# Altium PCB mini_backplane.PcbDoc (part 1 of 5)
Units mm, origin at the board's own origin, x right, y up, seen from the top; angles counter-clockwise.
Board outline 232.03 x 195 mm, 5 copper layers (Top Layer, MidLayer1, GND, POWER, Bottom Layer); 241 components, 200 nets, 1637 pads, 676 vias.
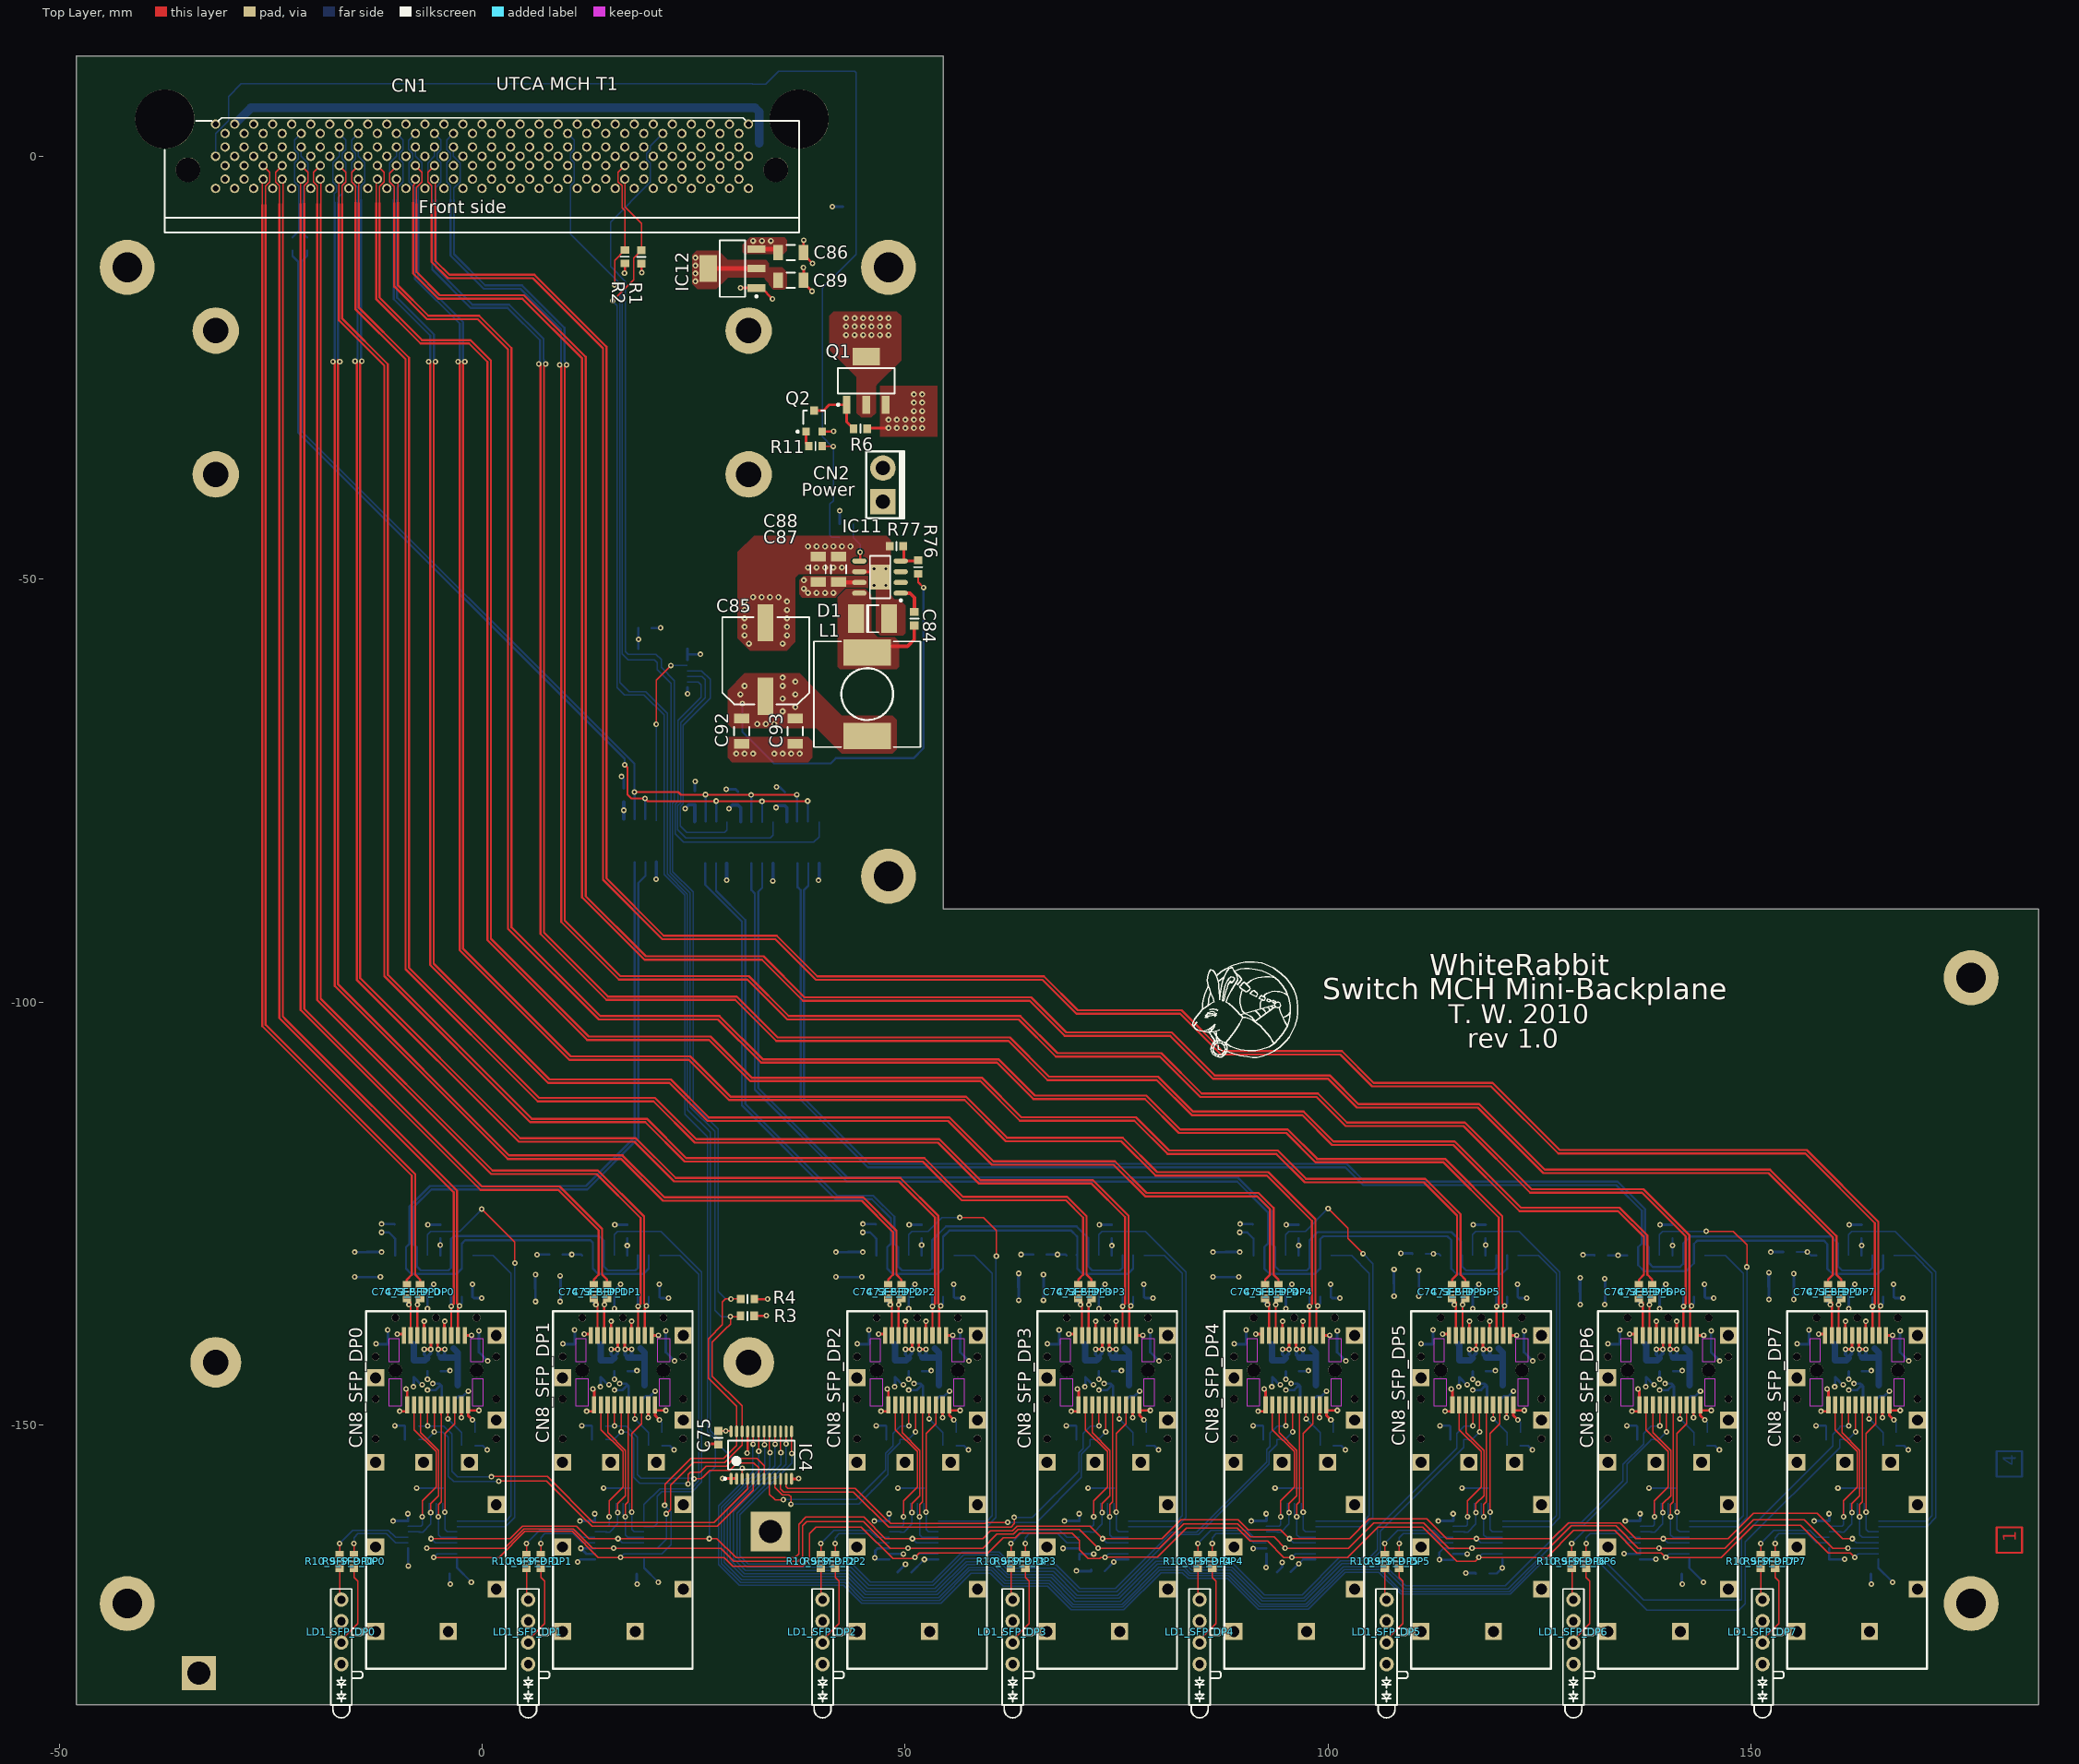
[diagram p0: Top Layer view]
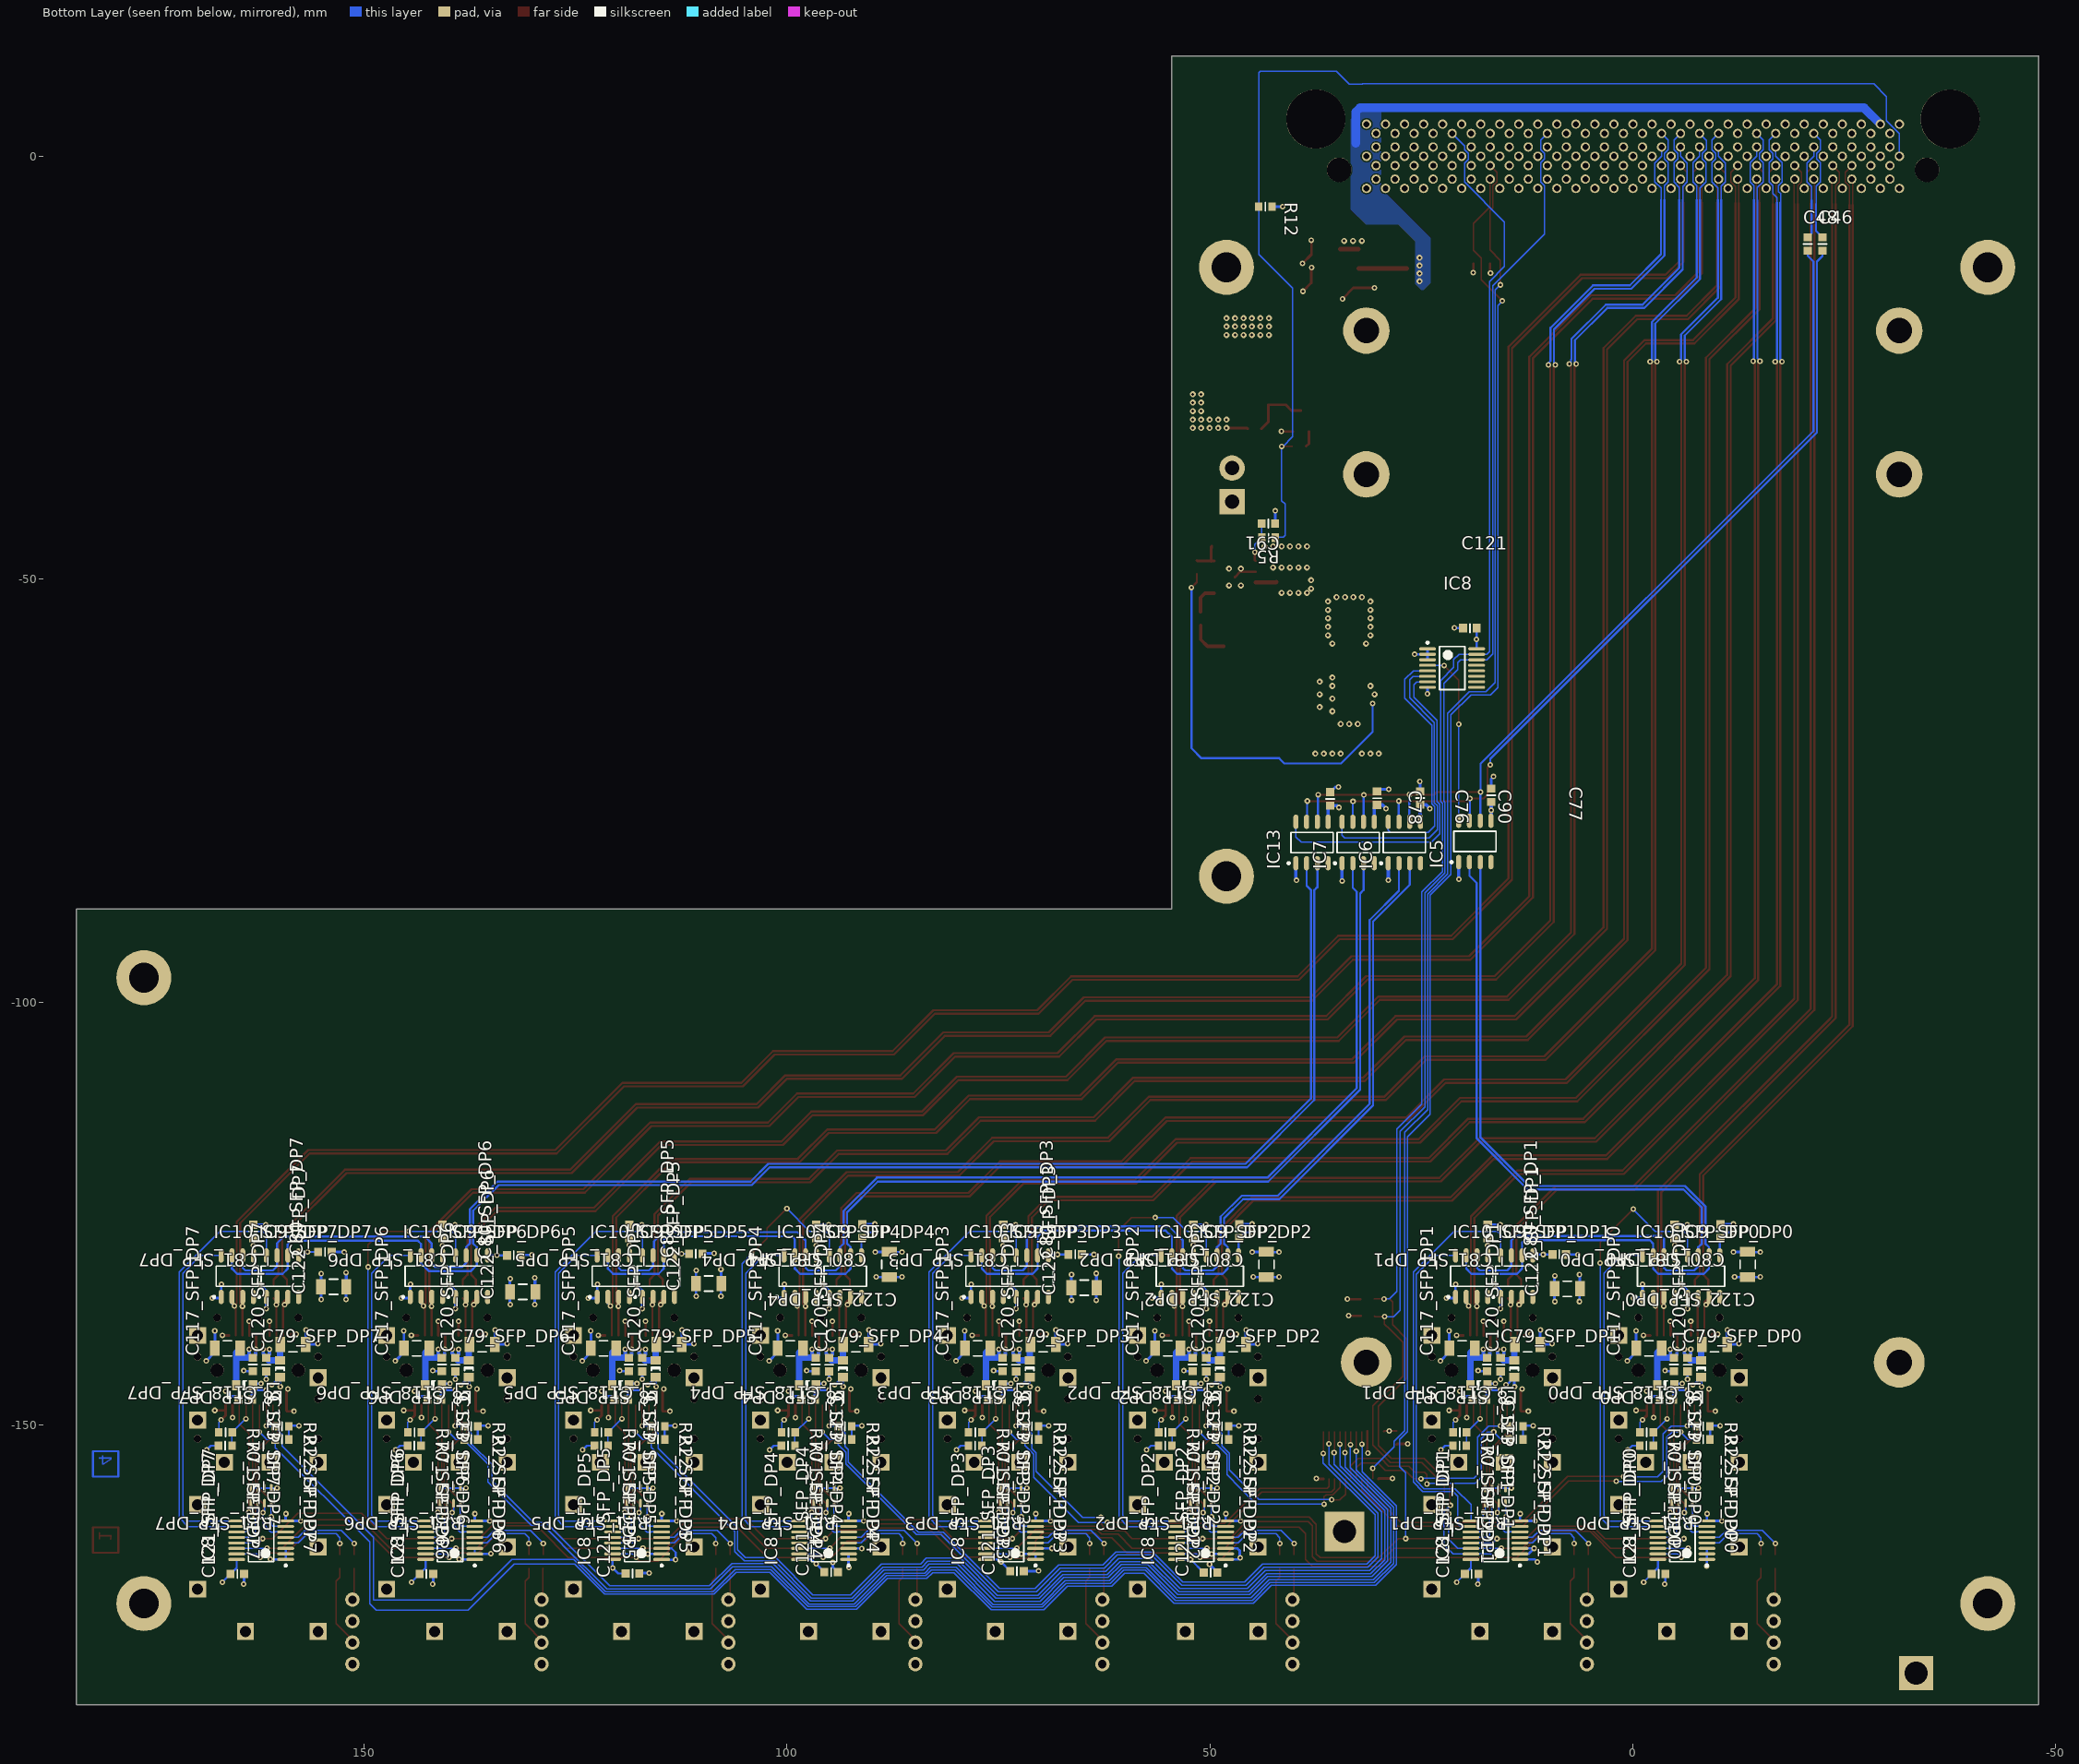
[diagram p1: Bottom Layer view, seen from below]
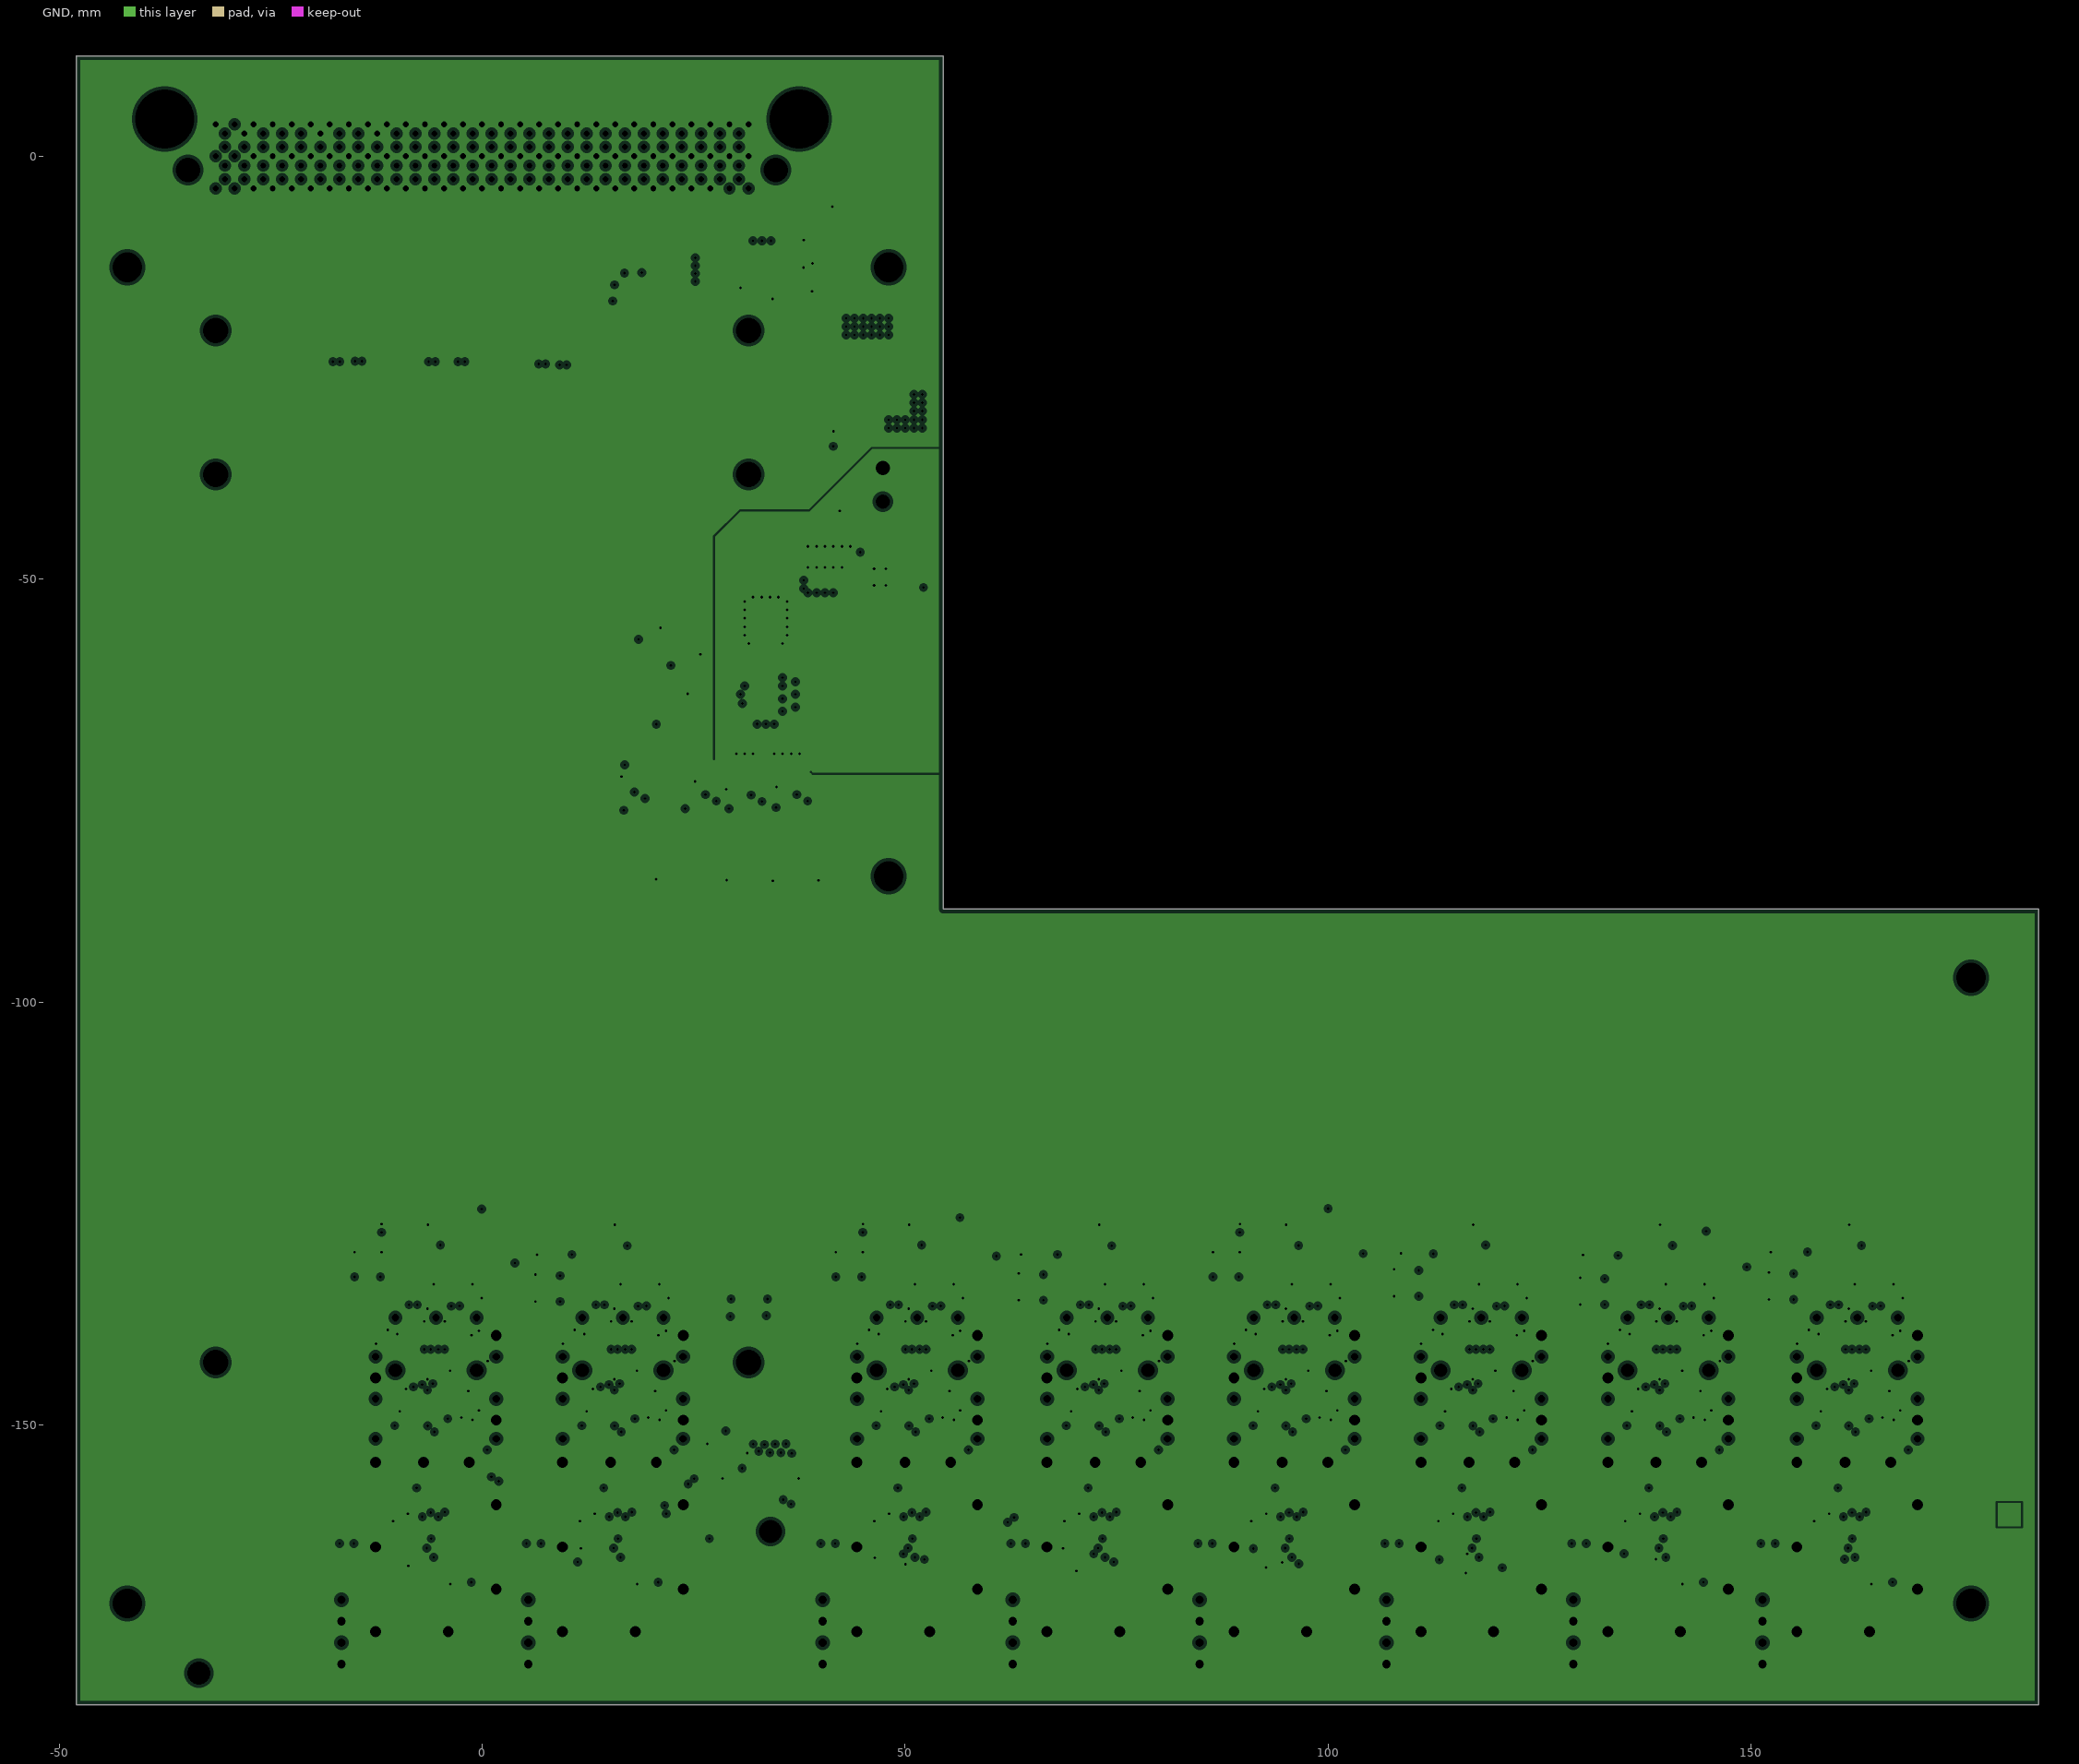
[diagram p2: GND, clearances drawn from the general rule]
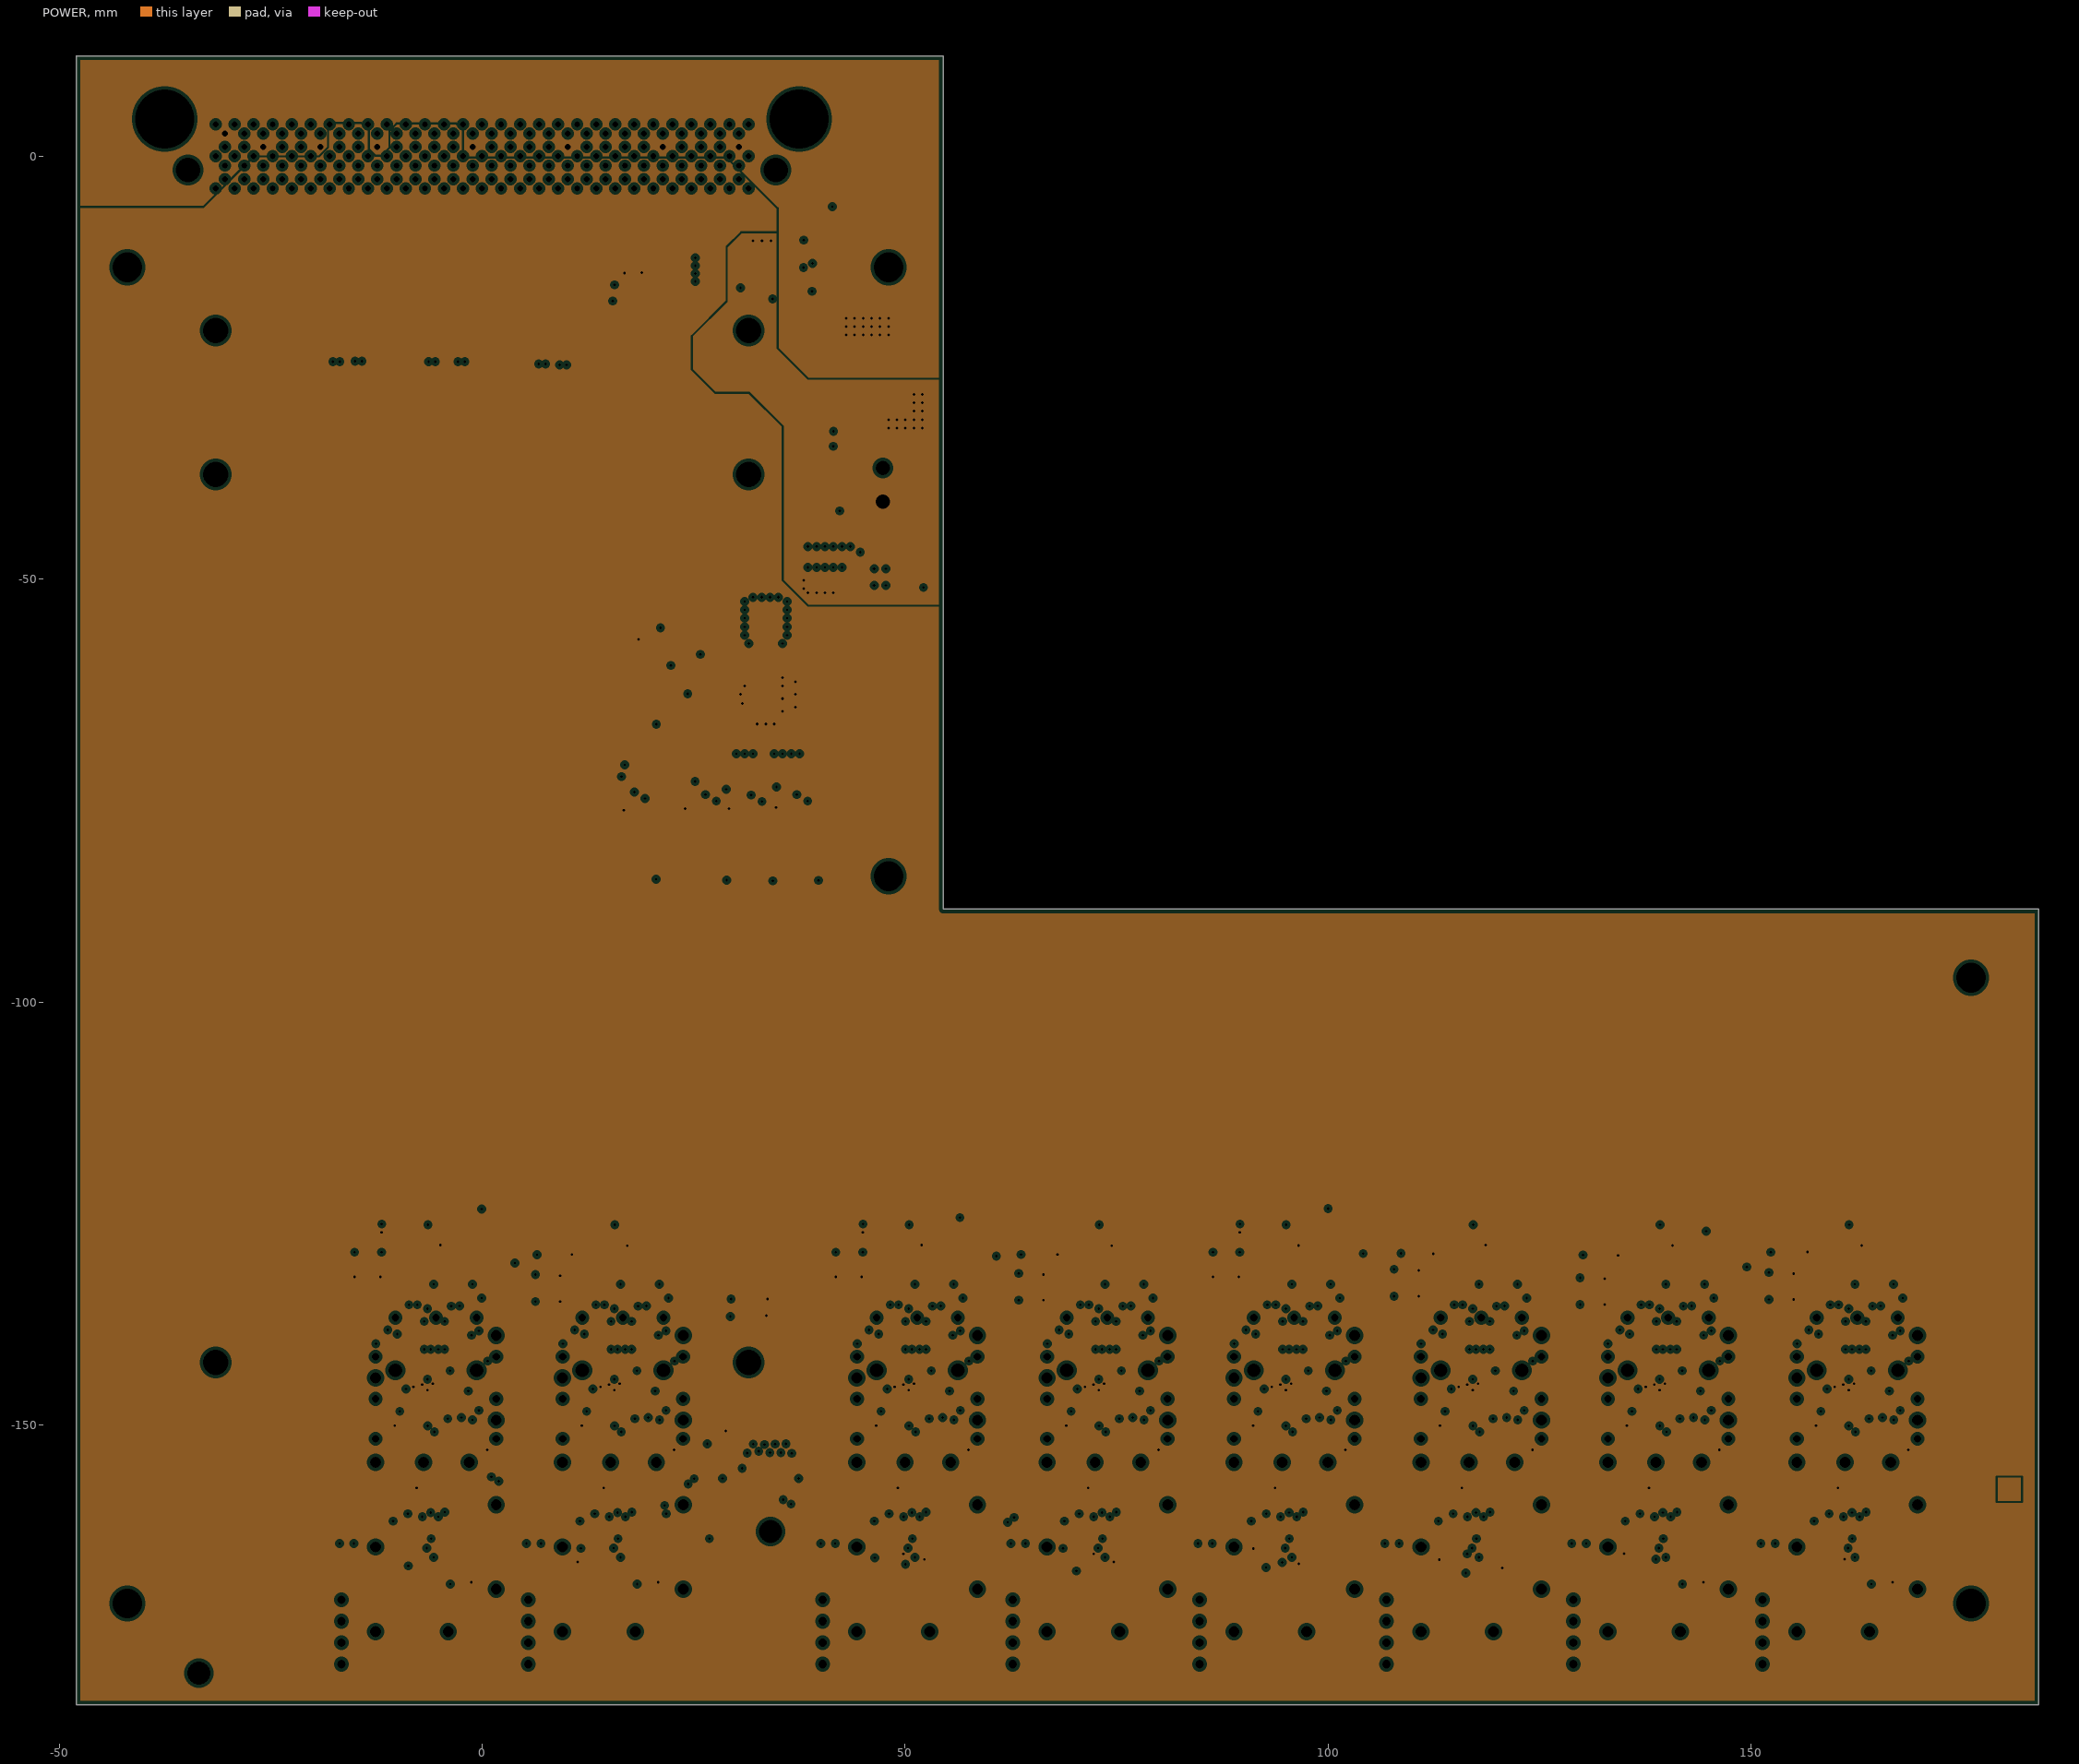
[diagram p3: POWER, clearances drawn from the general rule]
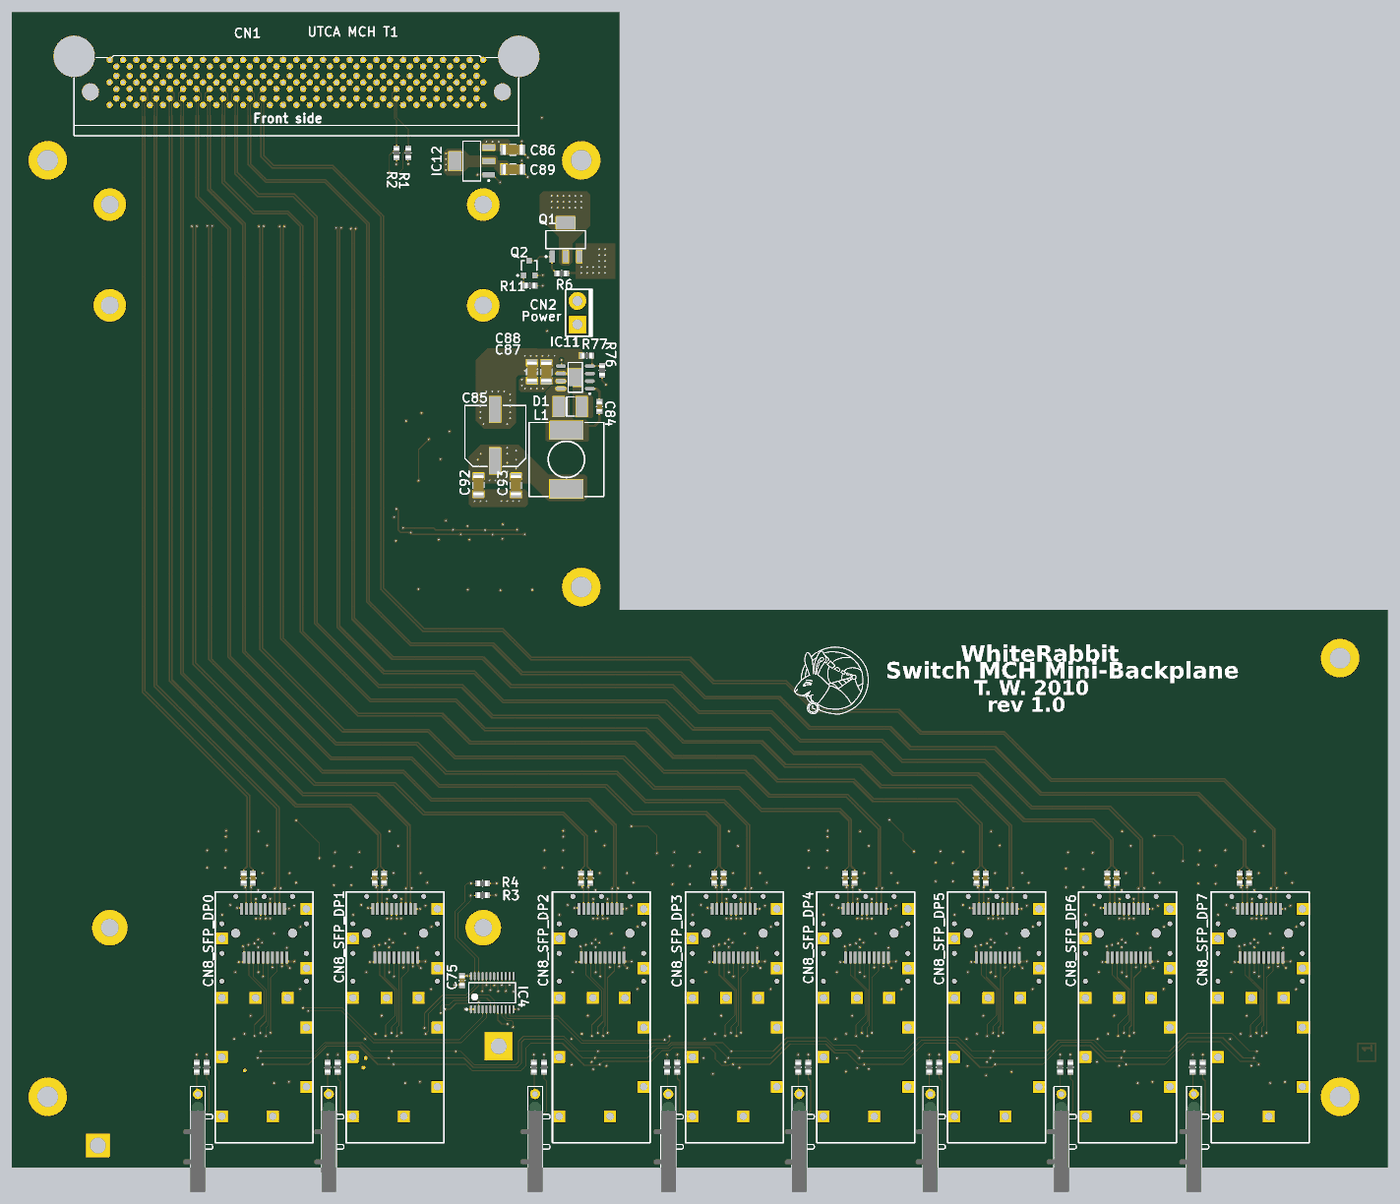
[diagram p8: 3D render of the assembled board from above, using the file's embedded part models]
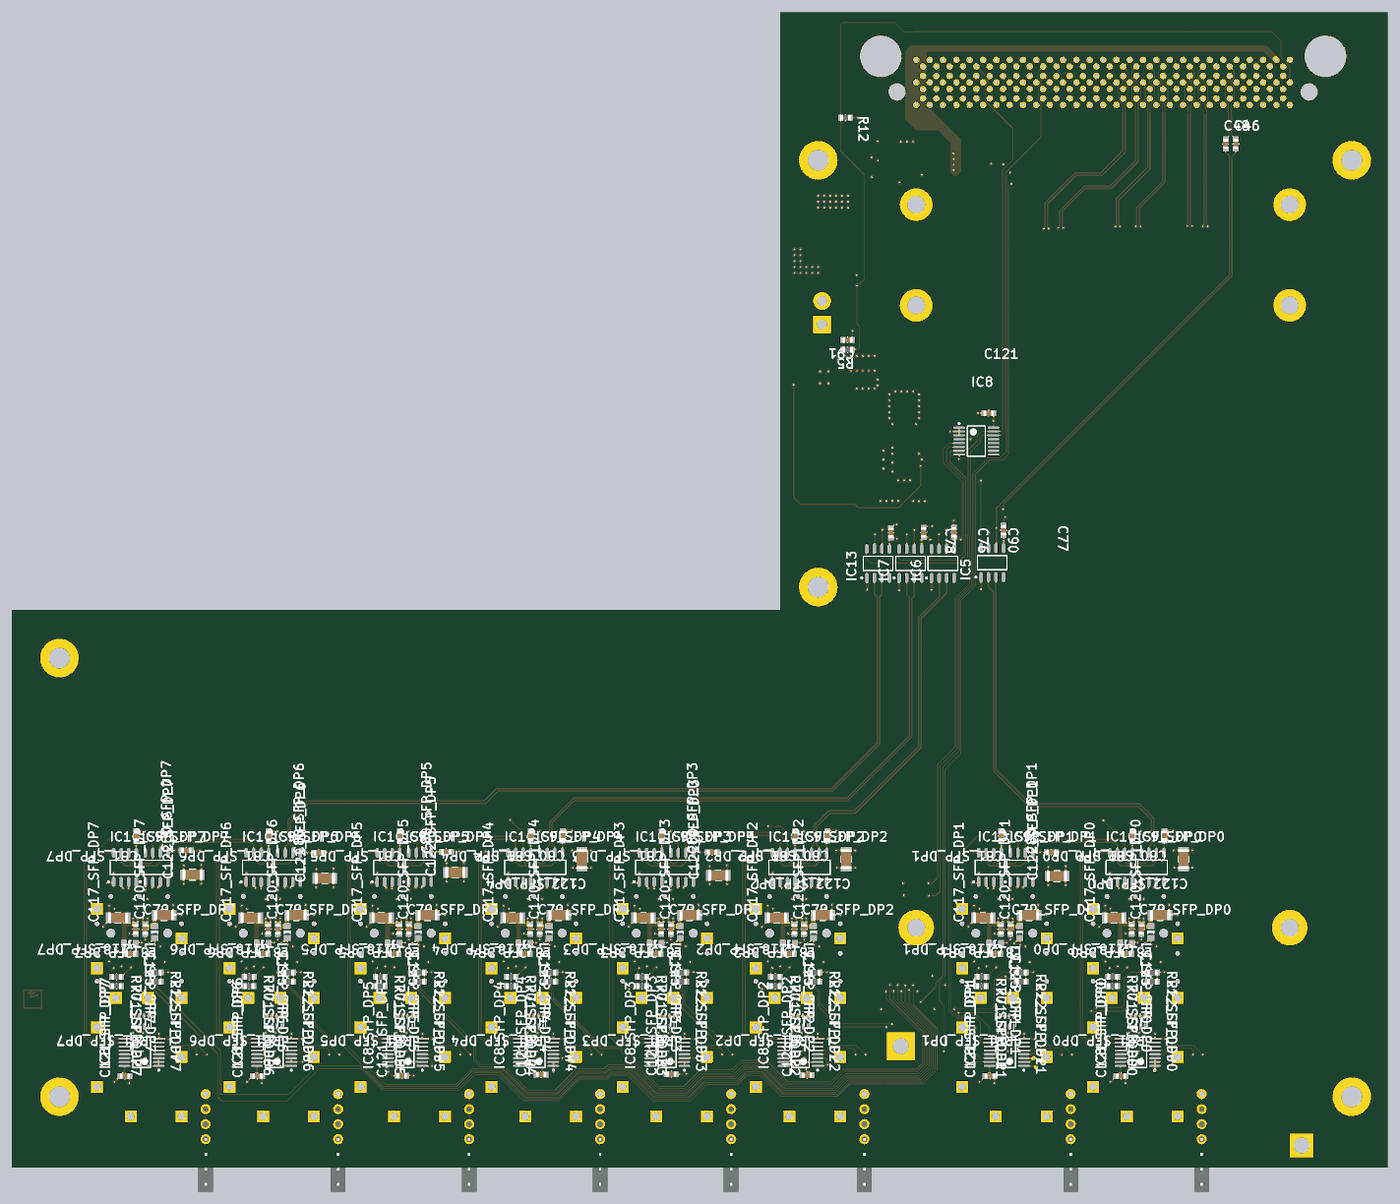
[diagram p9: 3D render of the assembled board from below, using the file's embedded part models]

## Layer stack, top to bottom
Top Layer: signal copper 0.0356
Dielectric: core 0.32, FR-4, Dk 4.8
MidLayer1: signal copper 0.0356
Dielectric: dielectric 0.32, FR-4, Dk 4.8
GND: plane copper 0.0356, net GND
Dielectric: prepreg 0.32, FR-4, Dk 4.8
POWER: plane copper 0.0356, net (Multiple Nets)
Dielectric: core 0.32, FR-4, Dk 4.8
Bottom Layer: signal copper 0.0356

## Board outline
-47.981,-183.124 -47.981,11.847 -47.956,11.872 54.508,11.872 54.508,-88.991 184.048,-88.991 184.048,-183.124

## Design rules (kind name [scope] priority, off if disabled: settings)
Clearance [All] p1: gap=0.152
DiffPairsRouting [All] p1: maxlimit=0.254 minlimit=0.152 mostfreqgap=0.254 toplayer_maxgap=0.152 toplayer_prefgap=0.152 midlayer1_mingap=0.254 bottomlayer_maxgap=0.152 bottomlayer_prefgap=0.152 maxuncoupledlength=12.7
HoleSize [All] p1: absolutevalues=TRUE maxlimit=5.08 minlimit=0.254 maxpercent=80.000 minpercent=20.000
MinimumSolderMaskSliver [All] p1: minsoldermaskwidth=0.051
PlaneClearance [All] p1: clearance=0.381
PlaneConnect [All] p1: planeconnectstyle=Direct reliefexpansion=0.508 reliefentries=4 reliefconductorwidth=0.254 reliefairgap=0.254
PolygonConnect PolygonConnect_via [All vs isvia] p1: connectstyle=Direct reliefconductorwidth=0.254 reliefentries=4 polygonreliefangle="90 Angle"
PolygonConnect [All] p2: connectstyle=Direct reliefconductorwidth=0.254 reliefentries=4 polygonreliefangle="90 Angle"
RoomDefinition U_power_supply [InComponentClass('U_power_supply')] p1: confinementstyle=ConfineIn formatcopy=TRUE lockcomponents=FALSE outline 24.561,-8.499 53.771,-8.499 53.771,-72.812 24.561,-72.812
RoomDefinition SFP_DP7 [InComponentClass('SFP_DP7')] p2: confinementstyle=ConfineIn formatcopy=TRUE lockcomponents=FALSE outline 150.012,-183.098 172.11,-183.098 172.11,-124.501 150.012,-124.501
RoomDefinition SFP_DP0 [InComponentClass('SFP_DP0')] p3: confinementstyle=ConfineIn formatcopy=TRUE lockcomponents=TRUE outline -18.009,-183.098 4.089,-183.098 4.089,-124.501 -18.009,-124.501
RoomDefinition SFP_DP1 [InComponentClass('SFP_DP1')] p4: confinementstyle=ConfineIn formatcopy=TRUE lockcomponents=FALSE outline 4.089,-183.098 26.187,-183.098 26.187,-124.501 4.089,-124.501
RoomDefinition U_i2c_stuff [InComponentClass('U_i2c_stuff')] p5: confinementstyle=ConfineIn formatcopy=TRUE lockcomponents=FALSE outline 26.593,-166.004 37.998,-166.004 37.998,-132.375 26.593,-132.375
RoomDefinition SFP_DP6 [InComponentClass('SFP_DP6')] p6: confinementstyle=ConfineIn formatcopy=TRUE lockcomponents=FALSE outline 127.66,-183.098 149.758,-183.098 149.758,-124.501 127.66,-124.501
RoomDefinition SFP_DP5 [InComponentClass('SFP_DP5')] p7: confinementstyle=ConfineIn formatcopy=TRUE lockcomponents=FALSE outline 105.562,-183.098 127.66,-183.098 127.66,-124.501 105.562,-124.501
RoomDefinition SFP_DP4 [InComponentClass('SFP_DP4')] p8: confinementstyle=ConfineIn formatcopy=TRUE lockcomponents=FALSE outline 83.464,-183.098 105.562,-183.098 105.562,-124.501 83.464,-124.501
RoomDefinition SFP_DP3 [InComponentClass('SFP_DP3')] p9: confinementstyle=ConfineIn formatcopy=TRUE lockcomponents=FALSE outline 61.366,-183.098 83.464,-183.098 83.464,-124.501 61.366,-124.501
RoomDefinition SFP_DP2 [InComponentClass('SFP_DP2')] p10: confinementstyle=ConfineIn formatcopy=TRUE lockcomponents=FALSE outline 38.887,-183.098 60.985,-183.098 60.985,-124.501 38.887,-124.501
RoutingVias [All] p1: holewidth=0.305 width=0.66 viastyle="Through Hole" minholewidth=0.305 minwidth=0.61 maxholewidth=2.54 maxwidth=2.54
SilkscreenOverComponentPads [All] p1: minsilkscreentomaskgap=0.254
SolderMaskExpansion [All] p1: expansion=0.102
TestPointUsage [All] p1: valid=0 allowmultiple=FALSE
Testpoint [All] p1: side=15 testpointundercomponent=TRUE minsize=1.016 maxsize=2.54 preferedsize=1.524 minholesize=0 maxholesize=1.016 preferedholesize=0.813 testpointgrid=0.025 style=1023 order=0123456789
Width Width_DIFF [(InDifferentialPairClass('All Differential Pairs'))] p1: maxlimit=0.254 minlimit=0.152 preferedwidth=0.254
Width [All] p2: maxlimit=2.54 minlimit=0.152 preferedwidth=0.152
18 further rules are at their usual default settings.

## Classes and differential pairs
component class mini_backplane: C46 C48 C76 C77 C78 C90 C? CN1 IC5 IC6 IC7 IC13 R1
component class SFP_DP0: C73_SFP_DP0 C74_SFP_DP0 C79_SFP_DP0 C80_SFP_DP0 C81_SFP_DP0 C117_SFP_DP0 C118_SFP_DP0 C120_SFP_DP0 C121_SFP_DP0 C122_SFP_DP0 C123_SFP_DP0 CN8_SFP_DP0 IC8_SFP_DP0 IC9_SFP_DP0 IC10_SFP_DP0 L8_SFP_DP0 L9_SFP_DP0 LD1_SFP_DP0 R9_SFP_DP0 R10_SFP_DP0 R21_SFP_DP0 R22_SFP_DP0 R70_SFP_DP0 R71_SFP_DP0 RP1_SFP_DP0
component class SFP_DP1: C73_SFP_DP1 C74_SFP_DP1 C79_SFP_DP1 C80_SFP_DP1 C81_SFP_DP1 C117_SFP_DP1 C118_SFP_DP1 C120_SFP_DP1 C121_SFP_DP1 C122_SFP_DP1 C123_SFP_DP1 CN8_SFP_DP1 IC8_SFP_DP1 IC9_SFP_DP1 IC10_SFP_DP1 L8_SFP_DP1 L9_SFP_DP1 LD1_SFP_DP1 R9_SFP_DP1 R10_SFP_DP1 R21_SFP_DP1 R22_SFP_DP1 R70_SFP_DP1 R71_SFP_DP1 RP1_SFP_DP1
component class SFP_DP2: C73_SFP_DP2 C74_SFP_DP2 C79_SFP_DP2 C80_SFP_DP2 C81_SFP_DP2 C117_SFP_DP2 C118_SFP_DP2 C120_SFP_DP2 C121_SFP_DP2 C122_SFP_DP2 C123_SFP_DP2 CN8_SFP_DP2 IC8_SFP_DP2 IC9_SFP_DP2 IC10_SFP_DP2 L8_SFP_DP2 L9_SFP_DP2 LD1_SFP_DP2 R9_SFP_DP2 R10_SFP_DP2 R21_SFP_DP2 R22_SFP_DP2 R70_SFP_DP2 R71_SFP_DP2 RP1_SFP_DP2
component class SFP_DP3: C73_SFP_DP3 C74_SFP_DP3 C79_SFP_DP3 C80_SFP_DP3 C81_SFP_DP3 C117_SFP_DP3 C118_SFP_DP3 C120_SFP_DP3 C121_SFP_DP3 C122_SFP_DP3 C123_SFP_DP3 CN8_SFP_DP3 IC8_SFP_DP3 IC9_SFP_DP3 IC10_SFP_DP3 L8_SFP_DP3 L9_SFP_DP3 LD1_SFP_DP3 R9_SFP_DP3 R10_SFP_DP3 R21_SFP_DP3 R22_SFP_DP3 R70_SFP_DP3 R71_SFP_DP3 RP1_SFP_DP3
component class SFP_DP4: C73_SFP_DP4 C74_SFP_DP4 C79_SFP_DP4 C80_SFP_DP4 C81_SFP_DP4 C117_SFP_DP4 C118_SFP_DP4 C120_SFP_DP4 C121_SFP_DP4 C122_SFP_DP4 C123_SFP_DP4 CN8_SFP_DP4 IC8_SFP_DP4 IC9_SFP_DP4 IC10_SFP_DP4 L8_SFP_DP4 L9_SFP_DP4 LD1_SFP_DP4 R9_SFP_DP4 R10_SFP_DP4 R21_SFP_DP4 R22_SFP_DP4 R70_SFP_DP4 R71_SFP_DP4 RP1_SFP_DP4
component class SFP_DP5: C73_SFP_DP5 C74_SFP_DP5 C79_SFP_DP5 C80_SFP_DP5 C81_SFP_DP5 C117_SFP_DP5 C118_SFP_DP5 C120_SFP_DP5 C121_SFP_DP5 C122_SFP_DP5 C123_SFP_DP5 CN8_SFP_DP5 IC8_SFP_DP5 IC9_SFP_DP5 IC10_SFP_DP5 L8_SFP_DP5 L9_SFP_DP5 LD1_SFP_DP5 R9_SFP_DP5 R10_SFP_DP5 R21_SFP_DP5 R22_SFP_DP5 R70_SFP_DP5 R71_SFP_DP5 RP1_SFP_DP5
component class SFP_DP6: C73_SFP_DP6 C74_SFP_DP6 C79_SFP_DP6 C80_SFP_DP6 C81_SFP_DP6 C117_SFP_DP6 C118_SFP_DP6 C120_SFP_DP6 C121_SFP_DP6 C122_SFP_DP6 C123_SFP_DP6 CN8_SFP_DP6 IC8_SFP_DP6 IC9_SFP_DP6 IC10_SFP_DP6 L8_SFP_DP6 L9_SFP_DP6 LD1_SFP_DP6 R9_SFP_DP6 R10_SFP_DP6 R21_SFP_DP6 R22_SFP_DP6 R70_SFP_DP6 R71_SFP_DP6 RP1_SFP_DP6
component class SFP_DP7: C73_SFP_DP7 C74_SFP_DP7 C79_SFP_DP7 C80_SFP_DP7 C81_SFP_DP7 C117_SFP_DP7 C118_SFP_DP7 C120_SFP_DP7 C121_SFP_DP7 C122_SFP_DP7 C123_SFP_DP7 CN8_SFP_DP7 IC8_SFP_DP7 IC9_SFP_DP7 IC10_SFP_DP7 L8_SFP_DP7 L9_SFP_DP7 LD1_SFP_DP7 R9_SFP_DP7 R10_SFP_DP7 R21_SFP_DP7 R22_SFP_DP7 R70_SFP_DP7 R71_SFP_DP7 RP1_SFP_DP7
channel class sfp_wrapper: SFP_DP0 SFP_DP1 SFP_DP2 SFP_DP3 SFP_DP4 SFP_DP5 SFP_DP6 SFP_DP7
component class U_i2c_stuff: C75 C121 IC4 IC8 R2 R3 R4
component class U_power_supply: C84 C85 C86 C87 C88 C89 C91 C92 C93 CN2 D1 IC11 IC12 L1 Q1 Q2 R5 R6 R11 R12 R76 R77
differential pair RD_OUT_SFP_DP7: +RD_OUT_SFP_DP7_P -RD_OUT_SFP_DP7_N
differential pair SFP_TX7: +SFP_TX7_P -SFP_TX7_N
differential pair RD_OUT_SFP_DP0: +RD_OUT_SFP_DP0_P -RD_OUT_SFP_DP0_N
differential pair RD_OUT_SFP_DP1: +RD_OUT_SFP_DP1_P -RD_OUT_SFP_DP1_N
differential pair RD_OUT_SFP_DP2: +RD_OUT_SFP_DP2_P -RD_OUT_SFP_DP2_N
differential pair RD_OUT_SFP_DP3: +RD_OUT_SFP_DP3_P -RD_OUT_SFP_DP3_N
differential pair RD_OUT_SFP_DP4: +RD_OUT_SFP_DP4_P -RD_OUT_SFP_DP4_N
differential pair RD_OUT_SFP_DP5: +RD_OUT_SFP_DP5_P -RD_OUT_SFP_DP5_N
differential pair RD_OUT_SFP_DP6: +RD_OUT_SFP_DP6_P -RD_OUT_SFP_DP6_N
differential pair SFP_TX0: +SFP_TX0_P -SFP_TX0_N
differential pair SFP_TX1: +SFP_TX1_P -SFP_TX1_N
differential pair SFP_TX2: +SFP_TX2_P -SFP_TX2_N
differential pair SFP_TX3: +SFP_TX3_P -SFP_TX3_N
differential pair SFP_TX4: +SFP_TX4_P -SFP_TX4_N
differential pair SFP_TX5: +SFP_TX5_P -SFP_TX5_N
differential pair SFP_TX6: +SFP_TX6_P -SFP_TX6_N
differential pair FB_01: +FB_01_P -FB_01_N
differential pair FB_23: +FB_23_P -FB_23_N
differential pair FB_45: +FB_45_P -FB_45_N
differential pair FB_67: +FB_67_P -FB_67_N
differential pair FB_MUXED: +FB_MUXED_P -FB_MUXED_N

## Components (designator, comment, footprint, x,y, rotation, side; value= is the part's Value field where it differs from the comment)
C46 "10n" CAPC1608X87N -22.403,-10.378 r90 bottom
C48 "10n" CAPC1608X87N -20.676,-10.378 r90 bottom
C73_SFP_DP0 "10n" CAPC1608X87N -7.316,-134.254 r270 top (schematic designator C73)
C73_SFP_DP1 "10n" CAPC1608X87N 14.782,-134.254 r270 top (schematic designator C73)
C73_SFP_DP2 "10n" CAPC1608X87N 49.58,-134.254 r270 top (schematic designator C73)
C73_SFP_DP3 "10n" CAPC1608X87N 72.059,-134.254 r270 top (schematic designator C73)
C73_SFP_DP4 "10n" CAPC1608X87N 94.157,-134.254 r270 top (schematic designator C73)
C73_SFP_DP5 "10n" CAPC1608X87N 116.255,-134.254 r270 top (schematic designator C73)
C73_SFP_DP6 "10n" CAPC1608X87N 138.353,-134.254 r270 top (schematic designator C73)
C73_SFP_DP7 "10n" CAPC1608X87N 160.705,-134.254 r270 top (schematic designator C73)
C74_SFP_DP0 "10n" CAPC1608X87N -8.89,-134.254 r270 top (schematic designator C74)
C74_SFP_DP1 "10n" CAPC1608X87N 13.208,-134.254 r270 top (schematic designator C74)
C74_SFP_DP2 "10n" CAPC1608X87N 48.006,-134.254 r270 top (schematic designator C74)
C74_SFP_DP3 "10n" CAPC1608X87N 70.485,-134.254 r270 top (schematic designator C74)
C74_SFP_DP4 "10n" CAPC1608X87N 92.583,-134.254 r270 top (schematic designator C74)
C74_SFP_DP5 "10n" CAPC1608X87N 114.681,-134.254 r270 top (schematic designator C74)
C74_SFP_DP6 "10n" CAPC1608X87N 136.779,-134.254 r270 top (schematic designator C74)
C74_SFP_DP7 "10n" CAPC1608X87N 159.131,-134.254 r270 top (schematic designator C74)
C75 "100n" CAPC1608X87N 27.94,-151.526 r90 top
C76 "100n" CAPC1608X87N 30.251,-75.91 r270 bottom
C77 "100n" CAPC1608X87N 16.764,-75.555 r270 bottom
C78 "100n" CAPC1608X87N 35.788,-75.987 r270 bottom
C79_SFP_DP0 "100n" CAPC1608X87N -6.452,-142.89 r90 bottom (schematic designator C79)
C79_SFP_DP1 "100n" CAPC1608X87N 15.646,-142.89 r90 bottom (schematic designator C79)
C79_SFP_DP2 "100n" CAPC1608X87N 50.444,-142.89 r90 bottom (schematic designator C79)
C79_SFP_DP3 "100n" CAPC1608X87N 72.923,-142.89 r90 bottom (schematic designator C79)
C79_SFP_DP4 "100n" CAPC1608X87N 95.021,-142.89 r90 bottom (schematic designator C79)
C79_SFP_DP5 "100n" CAPC1608X87N 117.119,-142.89 r90 bottom (schematic designator C79)
C79_SFP_DP6 "100n" CAPC1608X87N 139.217,-142.89 r90 bottom (schematic designator C79)
C79_SFP_DP7 "100n" CAPC1608X87N 161.569,-142.89 r90 bottom (schematic designator C79)
C80_SFP_DP0 "100n" CAPC1608X87N -10.364,-127.091 r270 bottom (schematic designator C80)
C80_SFP_DP1 "100n" CAPC1608X87N 8.712,-129.86 r0 bottom (schematic designator C80)
C80_SFP_DP2 "100n" CAPC1608X87N 46.532,-127.091 r270 bottom (schematic designator C80)
C80_SFP_DP3 "100n" CAPC1608X87N 65.938,-129.86 r0 bottom (schematic designator C80)
C80_SFP_DP4 "100n" CAPC1608X87N 91.109,-127.091 r270 bottom (schematic designator C80)
C80_SFP_DP5 "100n" CAPC1608X87N 110.794,-129.784 r0 bottom (schematic designator C80)
C80_SFP_DP6 "100n" CAPC1608X87N 132.308,-129.962 r0 bottom (schematic designator C80)
C80_SFP_DP7 "100n" CAPC1608X87N 154.635,-129.555 r0 bottom (schematic designator C80)
C81_SFP_DP0 "100n" CAPC1608X87N -4.928,-127.142 r270 bottom (schematic designator C81)
C81_SFP_DP1 "100n" CAPC1608X87N 17.17,-127.142 r270 bottom (schematic designator C81)
C81_SFP_DP2 "100n" CAPC1608X87N 51.968,-127.142 r270 bottom (schematic designator C81)
C81_SFP_DP3 "100n" CAPC1608X87N 74.447,-127.142 r270 bottom (schematic designator C81)
C81_SFP_DP4 "100n" CAPC1608X87N 96.545,-127.142 r270 bottom (schematic designator C81)
C81_SFP_DP5 "100n" CAPC1608X87N 118.643,-127.142 r270 bottom (schematic designator C81)
C81_SFP_DP6 "100n" CAPC1608X87N 140.741,-127.142 r270 bottom (schematic designator C81)
C81_SFP_DP7 "100n" CAPC1608X87N 163.093,-127.142 r270 bottom (schematic designator C81)
C84 "10n" CAPC1608X87N 51.104,-54.676 r270 top
C85 "470u/6.3V OS-CON" OSCON_F12 33.502,-59.502 r90 top
C86 "10u X7R" CAPC3216X140N 36.499,-11.369 r180 top
C87 "10u X7R" CAPC3216X140N 39.725,-48.809 r270 top
C88 "10u X7R" CAPC3216X140N 42.164,-48.834 r270 top
C89 "10u X7R" CAPC3216X140N 36.525,-14.671 r180 top
C90 "100n" CAPC1608X87N 25.171,-75.885 r270 bottom
C91 "1u" CAPC1608X87N 43.103,-43.449 r0 bottom
C92 "1u" CAPC3216X140N 30.708,-67.96 r90 top
C93 "1u" CAPC3216X140N 37.033,-67.96 r90 top
C117_SFP_DP0 "10u/6.3V X7R" CAPC3216X140N -1.88,-140.96 r0 bottom (schematic designator C117)
C117_SFP_DP1 "10u/6.3V X7R" CAPC3216X140N 20.218,-140.96 r0 bottom (schematic designator C117)
C117_SFP_DP2 "10u/6.3V X7R" CAPC3216X140N 55.016,-140.96 r0 bottom (schematic designator C117)
C117_SFP_DP3 "10u/6.3V X7R" CAPC3216X140N 77.495,-140.96 r0 bottom (schematic designator C117)
C117_SFP_DP4 "10u/6.3V X7R" CAPC3216X140N 99.593,-140.96 r0 bottom (schematic designator C117)
C117_SFP_DP5 "10u/6.3V X7R" CAPC3216X140N 121.691,-140.96 r0 bottom (schematic designator C117)
C117_SFP_DP6 "10u/6.3V X7R" CAPC3216X140N 143.789,-140.96 r0 bottom (schematic designator C117)
C117_SFP_DP7 "10u/6.3V X7R" CAPC3216X140N 166.141,-140.96 r0 bottom (schematic designator C117)
C118_SFP_DP0 "100n" CAPC1608X87N -4.852,-142.865 r270 bottom (schematic designator C118)
C118_SFP_DP1 "100n" CAPC1608X87N 17.246,-142.865 r270 bottom (schematic designator C118)
C118_SFP_DP2 "100n" CAPC1608X87N 52.044,-142.865 r270 bottom (schematic designator C118)
C118_SFP_DP3 "100n" CAPC1608X87N 74.523,-142.865 r270 bottom (schematic designator C118)
C118_SFP_DP4 "100n" CAPC1608X87N 96.621,-142.865 r270 bottom (schematic designator C118)
C118_SFP_DP5 "100n" CAPC1608X87N 118.719,-142.865 r270 bottom (schematic designator C118)
C118_SFP_DP6 "100n" CAPC1608X87N 140.817,-142.865 r270 bottom (schematic designator C118)
C118_SFP_DP7 "100n" CAPC1608X87N 163.169,-142.865 r270 bottom (schematic designator C118)
C120_SFP_DP0 "10u/6.3V X7R" CAPC3216X140N -9.627,-140.477 r0 bottom (schematic designator C120)
C120_SFP_DP1 "10u/6.3V X7R" CAPC3216X140N 12.471,-140.477 r0 bottom (schematic designator C120)
C120_SFP_DP2 "10u/6.3V X7R" CAPC3216X140N 47.269,-140.477 r0 bottom (schematic designator C120)
C120_SFP_DP3 "10u/6.3V X7R" CAPC3216X140N 69.748,-140.477 r0 bottom (schematic designator C120)
C120_SFP_DP4 "10u/6.3V X7R" CAPC3216X140N 91.846,-140.477 r0 bottom (schematic designator C120)
C120_SFP_DP5 "10u/6.3V X7R" CAPC3216X140N 113.944,-140.477 r0 bottom (schematic designator C120)
C120_SFP_DP6 "10u/6.3V X7R" CAPC3216X140N 136.042,-140.477 r0 bottom (schematic designator C120)
C120_SFP_DP7 "10u/6.3V X7R" CAPC3216X140N 158.394,-140.477 r0 bottom (schematic designator C120)
C121 "100n" CAPC1608X87N 19.278,-55.794 r180 bottom
C121_SFP_DP0 "100n" CAPC1608X87N -3.023,-167.63 r0 bottom (schematic designator C121)
C121_SFP_DP1 "100n" CAPC1608X87N 19.075,-167.63 r0 bottom (schematic designator C121)
C121_SFP_DP2 "100n" CAPC1608X87N 49.936,-167.477 r0 bottom (schematic designator C121)
C121_SFP_DP3 "100n" CAPC1608X87N 72.821,-167.3 r0 bottom (schematic designator C121)
C121_SFP_DP4 "100n" CAPC1608X87N 94.792,-167.401 r0 bottom (schematic designator C121)
C121_SFP_DP5 "100n" CAPC1608X87N 118.287,-167.579 r0 bottom (schematic designator C121)
C121_SFP_DP6 "100n" CAPC1608X87N 142.646,-167.63 r0 bottom (schematic designator C121)
C121_SFP_DP7 "100n" CAPC1608X87N 164.998,-167.63 r0 bottom (schematic designator C121)
C122_SFP_DP0 "10u/6.3V X7R" CAPC3216X140N -13.564,-131.028 r270 bottom (schematic designator C122)
C122_SFP_DP1 "10u/6.3V X7R" CAPC3216X140N 7.772,-133.924 r0 bottom (schematic designator C122)
C122_SFP_DP2 "10u/6.3V X7R" CAPC3216X140N 43.332,-131.028 r270 bottom (schematic designator C122)
C122_SFP_DP3 "10u/6.3V X7R" CAPC3216X140N 64.897,-133.772 r0 bottom (schematic designator C122)
C122_SFP_DP4 "10u/6.3V X7R" CAPC3216X140N 87.909,-131.028 r270 bottom (schematic designator C122)
C122_SFP_DP5 "10u/6.3V X7R" CAPC3216X140N 109.27,-133.289 r0 bottom (schematic designator C122)
C122_SFP_DP6 "10u/6.3V X7R" CAPC3216X140N 131.267,-134.28 r0 bottom (schematic designator C122)
C122_SFP_DP7 "10u/6.3V X7R" CAPC3216X140N 153.593,-133.67 r0 bottom (schematic designator C122)
C123_SFP_DP0 "100n" CAPC1608X87N -3.963,-147.03 r180 bottom (schematic designator C123)
C123_SFP_DP1 "100n" CAPC1608X87N 18.135,-147.03 r180 bottom (schematic designator C123)
C123_SFP_DP2 "100n" CAPC1608X87N 52.933,-147.03 r180 bottom (schematic designator C123)
C123_SFP_DP3 "100n" CAPC1608X87N 75.412,-147.03 r180 bottom (schematic designator C123)
C123_SFP_DP4 "100n" CAPC1608X87N 97.51,-147.03 r180 bottom (schematic designator C123)
C123_SFP_DP5 "100n" CAPC1608X87N 119.608,-147.03 r180 bottom (schematic designator C123)
C123_SFP_DP6 "100n" CAPC1608X87N 141.706,-147.03 r180 bottom (schematic designator C123)
C123_SFP_DP7 "100n" CAPC1608X87N 164.058,-147.03 r180 bottom (schematic designator C123)
CN1 "UTCA MCH T1" CON_AMC_MOLEX_75800_00001_REVERSE 0,-3.8 r0 top locked
CN2 "Power" CON_3.96_2 47.396,-40.833 r90 top
CN8_SFP_DP0 "SFP Module socket" SFP_SINGLE_PORT -12.573,-144.44 r0 top (schematic designator CN8)
CN8_SFP_DP1 "SFP Module socket" SFP_SINGLE_PORT 9.525,-144.44 r0 top locked (schematic designator CN8)
CN8_SFP_DP2 "SFP Module socket" SFP_SINGLE_PORT 44.323,-144.44 r0 top (schematic designator CN8)
CN8_SFP_DP3 "SFP Module socket" SFP_SINGLE_PORT 66.802,-144.44 r0 top (schematic designator CN8)
CN8_SFP_DP4 "SFP Module socket" SFP_SINGLE_PORT 88.9,-144.44 r0 top (schematic designator CN8)
CN8_SFP_DP5 "SFP Module socket" SFP_SINGLE_PORT 110.998,-144.44 r0 top (schematic designator CN8)
CN8_SFP_DP6 "SFP Module socket" SFP_SINGLE_PORT 133.096,-144.44 r0 top (schematic designator CN8)
CN8_SFP_DP7 "SFP Module socket" SFP_SINGLE_PORT 155.448,-144.44 r0 top locked (schematic designator CN8)
D1 "RSX510L-20" CD4532-1812 46.177,-54.676 r180 top
IC4 "PCA9548A" TSOP65P640-24AL 33.02,-153.584 r90 top
IC5 "DS90LV001" SOIC127P600-8AL 18.694,-81.016 r90 bottom
IC6 "DS90LV001" SOIC127P600-8AL 27.025,-81.143 r90 bottom
IC7 "DS90LV001" SOIC127P600-8AL 32.486,-81.143 r90 bottom
IC8 "PCA9534A" TSOP65P640-16AM 21.386,-60.518 r180 bottom
IC8_SFP_DP0 "PCA9534" TSOP65P640-16AM -5.842,-163.642 r0 bottom (schematic designator IC8)
IC8_SFP_DP1 "PCA9534" TSOP65P640-16AM 16.256,-163.642 r0 bottom (schematic designator IC8)
IC8_SFP_DP2 "PCA9534" TSOP65P640-16AM 51.054,-163.642 r0 bottom (schematic designator IC8)
IC8_SFP_DP3 "PCA9534" TSOP65P640-16AM 73.533,-163.642 r0 bottom (schematic designator IC8)
IC8_SFP_DP4 "PCA9534" TSOP65P640-16AM 95.631,-163.642 r0 bottom (schematic designator IC8)
IC8_SFP_DP5 "PCA9534" TSOP65P640-16AM 117.729,-163.642 r0 bottom (schematic designator IC8)
IC8_SFP_DP6 "PCA9534" TSOP65P640-16AM 139.827,-163.642 r0 bottom (schematic designator IC8)
IC8_SFP_DP7 "PCA9534" TSOP65P640-16AM 162.179,-163.642 r0 bottom (schematic designator IC8)
IC9_SFP_DP0 "DS90LV001" SOIC127P600-8AL -8.357,-132.425 r90 bottom (schematic designator IC9)
IC9_SFP_DP1 "DS90LV001" SOIC127P600-8AL 13.741,-132.425 r90 bottom (schematic designator IC9)
IC9_SFP_DP2 "DS90LV001" SOIC127P600-8AL 48.539,-132.425 r90 bottom (schematic designator IC9)
IC9_SFP_DP3 "DS90LV001" SOIC127P600-8AL 71.018,-132.425 r90 bottom (schematic designator IC9)
IC9_SFP_DP4 "DS90LV001" SOIC127P600-8AL 93.116,-132.425 r90 bottom (schematic designator IC9)
IC9_SFP_DP5 "DS90LV001" SOIC127P600-8AL 115.214,-132.425 r90 bottom (schematic designator IC9)
IC9_SFP_DP6 "DS90LV001" SOIC127P600-8AL 137.312,-132.425 r90 bottom (schematic designator IC9)
IC9_SFP_DP7 "DS90LV001" SOIC127P600-8AL 159.664,-132.425 r90 bottom (schematic designator IC9)
IC10_SFP_DP0 "DS90LV001" SOIC127P600-8AL -3.023,-132.425 r90 bottom (schematic designator IC10)
IC10_SFP_DP1 "DS90LV001" SOIC127P600-8AL 19.075,-132.425 r90 bottom (schematic designator IC10)
IC10_SFP_DP2 "DS90LV001" SOIC127P600-8AL 53.873,-132.425 r90 bottom (schematic designator IC10)
IC10_SFP_DP3 "DS90LV001" SOIC127P600-8AL 76.352,-132.425 r90 bottom (schematic designator IC10)
IC10_SFP_DP4 "DS90LV001" SOIC127P600-8AL 98.45,-132.425 r90 bottom (schematic designator IC10)
IC10_SFP_DP5 "DS90LV001" SOIC127P600-8AL 120.548,-132.425 r90 bottom (schematic designator IC10)
IC10_SFP_DP6 "DS90LV001" SOIC127P600-8AL 142.646,-132.425 r90 bottom (schematic designator IC10)
IC10_SFP_DP7 "DS90LV001" SOIC127P600-8AL 164.998,-132.425 r90 bottom (schematic designator IC10)
IC11 "TPS5430" SOIC127P600-8AL_POWERPAD 47.052,-49.758 r180 top
IC12 "LM1117-3.3" SOT223-4L 29.591,-13.274 r180 top
IC13 "DS90LV001" SOIC127P600-8AL 37.947,-81.143 r90 bottom
L1 "33 uH" IND0943-B 45.542,-57.064 r270 top
L8_SFP_DP0 "Inductor" INDC2012-0805 -8.052,-143.373 r270 bottom (schematic designator L8)
L8_SFP_DP1 "Inductor" INDC2012-0805 14.046,-143.373 r270 bottom (schematic designator L8)
L8_SFP_DP2 "Inductor" INDC2012-0805 48.844,-143.373 r270 bottom (schematic designator L8)
L8_SFP_DP3 "Inductor" INDC2012-0805 71.323,-143.373 r270 bottom (schematic designator L8)
L8_SFP_DP4 "Inductor" INDC2012-0805 93.421,-143.373 r270 bottom (schematic designator L8)
L8_SFP_DP5 "Inductor" INDC2012-0805 115.519,-143.373 r270 bottom (schematic designator L8)
L8_SFP_DP6 "Inductor" INDC2012-0805 137.617,-143.373 r270 bottom (schematic designator L8)
L8_SFP_DP7 "Inductor" INDC2012-0805 159.969,-143.373 r270 bottom (schematic designator L8)
L9_SFP_DP0 "Inductor" INDC2012-0805 -3.887,-145.303 r180 bottom (schematic designator L9)
L9_SFP_DP1 "Inductor" INDC2012-0805 18.211,-145.303 r180 bottom (schematic designator L9)
L9_SFP_DP2 "Inductor" INDC2012-0805 53.009,-145.303 r180 bottom (schematic designator L9)
L9_SFP_DP3 "Inductor" INDC2012-0805 75.488,-145.303 r180 bottom (schematic designator L9)
L9_SFP_DP4 "Inductor" INDC2012-0805 97.586,-145.303 r180 bottom (schematic designator L9)
L9_SFP_DP5 "Inductor" INDC2012-0805 119.684,-145.303 r180 bottom (schematic designator L9)
L9_SFP_DP6 "Inductor" INDC2012-0805 141.782,-145.303 r180 bottom (schematic designator L9)
L9_SFP_DP7 "Inductor" INDC2012-0805 164.134,-145.303 r180 bottom (schematic designator L9)
LD1_SFP_DP0 "Red/Green" LED_DIALIGHT_571-0112-100F -16.637,-178.298 r90 top (schematic designator LD1)
LD1_SFP_DP1 "Red/Green" LED_DIALIGHT_571-0112-100F 5.461,-178.298 r90 top (schematic designator LD1)
LD1_SFP_DP2 "Red/Green" LED_DIALIGHT_571-0112-100F 40.259,-178.298 r90 top (schematic designator LD1)
LD1_SFP_DP3 "Red/Green" LED_DIALIGHT_571-0112-100F 62.738,-178.298 r90 top (schematic designator LD1)
LD1_SFP_DP4 "Red/Green" LED_DIALIGHT_571-0112-100F 84.836,-178.298 r90 top (schematic designator LD1)
LD1_SFP_DP5 "Red/Green" LED_DIALIGHT_571-0112-100F 106.934,-178.298 r90 top (schematic designator LD1)
LD1_SFP_DP6 "Red/Green" LED_DIALIGHT_571-0112-100F 129.032,-178.298 r90 top (schematic designator LD1)
LD1_SFP_DP7 "Red/Green" LED_DIALIGHT_571-0112-100F 151.384,-178.298 r90 top (schematic designator LD1)
Q1 "FDT434P" SOT223-4L 45.415,-26.533 r90 top
Q2 "BC847B" SOT-23 39.268,-31.308 r0 top
R1 "10k" RESC1608X55N 18.846,-11.902 r270 top
R2 "10k" RESC1608X55N 16.891,-11.877 r270 top
R3 "10k" RESC1608X55N 31.369,-137.124 r0 top
R4 "10k" RESC1608X55N 31.394,-135.143 r0 top
R5 "220k" RESC1608X55N 43.078,-45.1 r0 bottom
R6 "10k" RESC1608X55N 44.729,-32.222 r0 top
R9_SFP_DP0 "330" RESC1608X55N -15.139,-166.157 r270 top (schematic designator R9)
R9_SFP_DP1 "330" RESC1608X55N 6.959,-166.157 r270 top (schematic designator R9)
R9_SFP_DP2 "330" RESC1608X55N 41.757,-166.157 r270 top (schematic designator R9)
R9_SFP_DP3 "330" RESC1608X55N 64.236,-166.157 r270 top (schematic designator R9)
R9_SFP_DP4 "330" RESC1608X55N 86.334,-166.157 r270 top (schematic designator R9)
R9_SFP_DP5 "330" RESC1608X55N 108.432,-166.157 r270 top (schematic designator R9)
R9_SFP_DP6 "330" RESC1608X55N 130.53,-166.157 r270 top (schematic designator R9)
R9_SFP_DP7 "330" RESC1608X55N 152.882,-166.157 r270 top (schematic designator R9)
R10_SFP_DP0 "330" RESC1608X55N -16.841,-166.157 r270 top (schematic designator R10)
R10_SFP_DP1 "330" RESC1608X55N 5.257,-166.157 r270 top (schematic designator R10)
R10_SFP_DP2 "330" RESC1608X55N 40.055,-166.157 r270 top (schematic designator R10)
R10_SFP_DP3 "330" RESC1608X55N 62.534,-166.157 r270 top (schematic designator R10)
R10_SFP_DP4 "330" RESC1608X55N 84.632,-166.157 r270 top (schematic designator R10)
R10_SFP_DP5 "330" RESC1608X55N 106.73,-166.157 r270 top (schematic designator R10)
R10_SFP_DP6 "330" RESC1608X55N 128.828,-166.157 r270 top (schematic designator R10)
R10_SFP_DP7 "330" RESC1608X55N 151.18,-166.157 r270 top (schematic designator R10)
R11 "10k" RESC1608X55N 39.42,-34.28 r0 top
R12 "10k" RESC1608X55N 43.459,-5.959 r180 bottom
R21_SFP_DP0 "10k" RESC1608X55N -8.306,-150.18 r180 bottom (schematic designator R21)
R21_SFP_DP1 "10k" RESC1608X55N 13.792,-150.18 r180 bottom (schematic designator R21)
R21_SFP_DP2 "10k" RESC1608X55N 48.59,-150.18 r180 bottom (schematic designator R21)
R21_SFP_DP3 "10k" RESC1608X55N 71.069,-150.18 r180 bottom (schematic designator R21)
R21_SFP_DP4 "10k" RESC1608X55N 93.167,-150.18 r180 bottom (schematic designator R21)
R21_SFP_DP5 "10k" RESC1608X55N 115.265,-150.18 r180 bottom (schematic designator R21)
R21_SFP_DP6 "10k" RESC1608X55N 137.363,-150.18 r180 bottom (schematic designator R21)
R21_SFP_DP7 "10k" RESC1608X55N 159.715,-150.18 r180 bottom (schematic designator R21)
R22_SFP_DP0 "10k" RESC1608X55N -8.306,-151.729 r180 bottom (schematic designator R22)
R22_SFP_DP1 "10k" RESC1608X55N 13.792,-151.729 r180 bottom (schematic designator R22)
R22_SFP_DP2 "10k" RESC1608X55N 48.59,-151.729 r180 bottom (schematic designator R22)
R22_SFP_DP3 "10k" RESC1608X55N 71.069,-151.729 r180 bottom (schematic designator R22)
R22_SFP_DP4 "10k" RESC1608X55N 93.167,-151.729 r180 bottom (schematic designator R22)
R22_SFP_DP5 "10k" RESC1608X55N 115.265,-151.729 r180 bottom (schematic designator R22)
R22_SFP_DP6 "10k" RESC1608X55N 137.363,-151.729 r180 bottom (schematic designator R22)
R22_SFP_DP7 "10k" RESC1608X55N 159.715,-151.729 r180 bottom (schematic designator R22)
R70_SFP_DP0 "0*" RESC1608X55N -1.626,-150.891 r180 bottom (schematic designator R70)
R70_SFP_DP1 "0*" RESC1608X55N 20.472,-150.891 r180 bottom (schematic designator R70)
R70_SFP_DP2 "0*" RESC1608X55N 55.27,-150.891 r180 bottom (schematic designator R70)
R70_SFP_DP3 "0*" RESC1608X55N 77.749,-150.891 r180 bottom (schematic designator R70)
R70_SFP_DP4 "0*" RESC1608X55N 99.847,-150.891 r180 bottom (schematic designator R70)
R70_SFP_DP5 "0*" RESC1608X55N 121.945,-150.891 r180 bottom (schematic designator R70)
R70_SFP_DP6 "0*" RESC1608X55N 144.043,-150.891 r180 bottom (schematic designator R70)
R70_SFP_DP7 "0*" RESC1608X55N 166.395,-150.891 r180 bottom (schematic designator R70)
R71_SFP_DP0 "0*" RESC1608X55N -1.601,-152.466 r180 bottom (schematic designator R71)
R71_SFP_DP1 "0*" RESC1608X55N 20.497,-152.466 r180 bottom (schematic designator R71)
R71_SFP_DP2 "0*" RESC1608X55N 55.295,-152.466 r180 bottom (schematic designator R71)
R71_SFP_DP3 "0*" RESC1608X55N 77.774,-152.466 r180 bottom (schematic designator R71)
R71_SFP_DP4 "0*" RESC1608X55N 99.872,-152.466 r180 bottom (schematic designator R71)
R71_SFP_DP5 "0*" RESC1608X55N 121.97,-152.466 r180 bottom (schematic designator R71)
R71_SFP_DP6 "0*" RESC1608X55N 144.068,-152.466 r180 bottom (schematic designator R71)
R71_SFP_DP7 "0*" RESC1608X55N 166.42,-152.466 r180 bottom (schematic designator R71)
R76 "10k" RESC1608X55N 51.562,-48.58 r270 top
R77 "5k76" RESC1608X55N 48.996,-46.091 r0 top
RP1_SFP_DP0 "10k" CAY-16 -7.036,-157.495 r270 bottom (schematic designator RP1)
RP1_SFP_DP1 "10k" CAY-16 15.062,-157.495 r270 bottom (schematic designator RP1)
RP1_SFP_DP2 "10k" CAY-16 49.86,-157.495 r270 bottom (schematic designator RP1)
RP1_SFP_DP3 "10k" CAY-16 72.339,-157.495 r270 bottom (schematic designator RP1)
RP1_SFP_DP4 "10k" CAY-16 94.437,-157.495 r270 bottom (schematic designator RP1)
RP1_SFP_DP5 "10k" CAY-16 116.535,-157.495 r270 bottom (schematic designator RP1)
RP1_SFP_DP6 "10k" CAY-16 138.633,-157.495 r270 bottom (schematic designator RP1)
RP1_SFP_DP7 "10k" CAY-16 160.985,-157.495 r270 bottom (schematic designator RP1)

## Footprints (in the part's own frame and the unit in brackets; to place one, negate y for a bottom-side part, rotate by r counter-clockwise, add the part's x,y. Pads: shape width x height; smd on the part's side, far side on the other; paste and mask are expansions set on the pad)
CAPC1608X87N [mm] "Chip Capacitor, Body 1.6x0.8mm IPC Medium Density"
  rect 0.95x1 smd: 1(-0.8,0) 2(0.8,0)
  silkscreen extent 0,-0.5 0,0.5, body extent -0.87,-0.47 0.88,0.48, height 0.87
CAPC3216X140N [mm] "Chip Capacitor, Body 3.2x1.6mm, IPC Medium Density"
  rect 1.15x1.8 smd: 1(-1.5,0) 2(1.5,0)
  silkscreen extent -0.5,-0.9 0.5,0.9, body extent -1.7,-0.9 1.7,0.9, height 1.4
CAY-16 [mil]
  oval 40x12 smd: 1(0,0) 2(0,-31.5) 3(0,-62.99) 4(0,-94.49) 5(70,-94.49) 6(70,-62.99) 7(70,-31.5) 8(70,0)
  silkscreen extent 0,-110 70,15
CD4532-1812 [mm] "Chip Diode; Body 4.5 x 3.2 mm (LxW typ)"
  rect 1.9x3.4 smd: 1(-1.95,0) 2(1.95,0)
  silkscreen extent -0.7,-1.6 0.7,1.6
CON_3.96_2 [mm]
  rect 3x3 hole 1.7: 1(0,0)
  round 3 hole 1.7: 2(3.96,0)
  silkscreen extent -1.98,-2.5 5.94,1.98
CON_AMC_MOLEX_75800_00001_REVERSE [mm] "Molex AMC right-angle connector (pins reversed for the MCH)"
  round 1.1 hole 0.7: 1(-31.5,7.6) 2(-30.375,6.5) 3(-30.375,4.9) 4(-29.25,7.6) 5(-28.125,6.5) 6(-28.125,4.9) 7(-27,7.6) 8(-25.875,6.5) 9(-25.875,4.9) 10(-24.75,7.6) 11(-23.625,6.5) 12(-23.625,4.9) 13(-22.5,7.6) 14(-21.375,6.5) 15(-21.375,4.9) 16(-20.25,7.6) 17(-19.125,6.5) 18(-19.125,4.9) 19(-18,7.6) 20(-16.875,6.5) 21(-16.875,4.9) 22(-15.75,7.6) 23(-14.625,6.5) 24(-14.625,4.9) 25(-13.5,7.6) 26(-12.375,6.5) 27(-12.375,4.9) 28(-11.25,7.6) 29(-10.125,6.5) 30(-10.125,4.9) 31(-9,7.6) 32(-7.875,6.5) 33(-7.875,4.9) 34(-6.75,7.6) 35(-5.625,6.5) 36(-5.625,4.9) 37(-4.5,7.6) 38(-3.375,6.5) 39(-3.375,4.9) 40(-2.25,7.6) 41(-1.125,6.5) 42(-1.125,4.9) 43(0,7.6) 44(1.125,6.5) 45(1.125,4.9) 46(2.25,7.6) 47(3.375,6.5) 48(3.375,4.9) 49(4.5,7.6) 50(5.625,6.5) 51(5.625,4.9) 52(6.75,7.6) 53(7.875,6.5) 54(7.875,4.9) 55(9,7.6) 56(10.125,6.5) 57(10.125,4.9) 58(11.25,7.6) 59(12.375,6.5) 60(12.375,4.9) 61(13.5,7.6) 62(14.625,6.5) 63(14.625,4.9) 64(15.75,7.6) 65(16.875,6.5) 66(16.875,4.9) 67(18,7.6) 68(19.125,6.5) 69(19.125,4.9) 70(20.25,7.6) 71(21.375,6.5) 72(21.375,4.9) 73(22.5,7.6) 74(23.625,6.5) 75(23.625,4.9) 76(24.75,7.6) 77(25.875,6.5) 78(25.875,4.9) 79(27,7.6) 80(28.125,6.5) 81(28.125,4.9) 82(29.25,7.6) 83(30.375,6.5) 84(30.375,4.9) 85(31.5,7.6) 86(31.5,3.8) 86A(31.5,0) 87(30.375,1.1) 88(30.375,2.7) 89(29.25,3.8) 89A(29.25,0) 90(28.125,1.1) 91(28.125,2.7) 92(27,3.8) 92A(27,0) 93(25.875,1.1) 94(25.875,2.7) 95(24.75,3.8) 95A(24.75,0) 96(23.625,1.1) 97(23.625,2.7) 98(22.5,3.8) 98A(22.5,0) 99(21.375,1.1) 100(21.375,2.7) 101(20.25,3.8) 101A(20.25,0) 102(19.125,1.1) 103(19.125,2.7) 104(18,3.8) 104A(18,0) 105(16.875,1.1) 106(16.875,2.7) 107(15.75,3.8) 107A(15.75,0) 108(14.625,1.1) 109(14.625,2.7) 110(13.5,3.8) 110A(13.5,0) 111(12.375,1.1) 112(12.375,2.7) 113(11.25,3.8) 113A(11.25,0) 114(10.125,1.1) 115(10.125,2.7) 116(9,3.8) 116A(9,0) 117(7.875,1.1) 118(7.875,2.7) 119(6.75,3.8) 119A(6.75,0) 120(5.625,1.1) 121(5.625,2.7) 122(4.5,3.8) 122A(4.5,0) 123(3.375,1.1) 124(3.375,2.7) 125(2.25,3.8) 125A(2.25,0) 126(1.125,1.1) 127(1.125,2.7) 128(0,3.8) 128A(0,0) 129(-1.125,1.1) 130(-1.125,2.7) 131(-2.25,3.8) 131A(-2.25,0) 132(-3.375,1.1) 133(-3.375,2.7) 134(-4.5,3.8) 134A(-4.5,0) 135(-5.625,1.1) 136(-5.625,2.7) 137(-6.75,3.8) 137A(-6.75,0) 138(-7.875,1.1) 139(-7.875,2.7) 140(-9,3.8) 140A(-9,0) 141(-10.125,1.1) 142(-10.125,2.7) 143(-11.25,3.8) 143A(-11.25,0) 144(-12.375,1.1) 145(-12.375,2.7) 146(-13.5,3.8) 146A(-13.5,0) 147(-14.625,1.1) 148(-14.625,2.7) 149(-15.75,3.8) 149A(-15.75,0) 150(-16.875,1.1) 151(-16.875,2.7) 152(-18,3.8) 152A(-18,0) 153(-19.125,1.1) 154(-19.125,2.7) 155(-20.25,3.8) 155A(-20.25,0) 156(-21.375,1.1) 157(-21.375,2.7) 158(-22.5,3.8) 158A(-22.5,0) 159(-23.625,1.1) 160(-23.625,2.7) 161(-24.75,3.8) 161A(-24.75,0) 162(-25.875,1.1) 163(-25.875,2.7) 164(-27,3.8) 164A(-27,0) 165(-28.125,1.1) 166(-28.125,2.7) 167(-29.25,3.8) 168(-30.375,1.1) 169(-30.375,2.7) 170(-31.5,3.8) 170A(-31.5,0) nc(-29.25,0)
  round 2.9 hole 2.9: M1(-34.75,2.2) M2(34.75,2.2)
  round 7 hole 7: M3(-37.5,8.2) M4(37.5,8.2)
  silkscreen extent -37.5,-5.2 37.5,8.35
IND0943-B [mm]
  rect 3.1x5.6 smd: 1(1.6,0) 2(11.5,0)
  silkscreen extent 0.3,-6.3 12.8,6.3
INDC2012-0805 [mm] "Chip Inductor; Body 2 x 1.2 mm (LxW typ)"
  rect 1x1.2 smd: 1(-1,0) 2(1,0)
  silkscreen extent -0.2,-0.5 0.2,0.5
LED_DIALIGHT_571-0112-100F [mm] "2x 2mm LED (Top: Red, Bot: Green) PCB Edge Mounting (With positioning pins) DIALIGHT 571 Serie"
  round 1.7 hole 1: 1(0,0) 2(2.54,0) 3(5.08,0) 4(7.62,0)
  silkscreen extent -6.35,-2.52 8.89,1.25, body extent -6.35,-2.52 8.89,1.25, height 8.6
OSCON_F12 [mm]
  rect 4.4x1.9 smd: 1(-4.35,0) 2(4.35,0)
  silkscreen extent -5.3,-5.2 5,5.1
RESC1608X55N [mm] "Chip Resistor, EIA 0603, Metric 1608, Body 1.6x0.8mm, IPC Medium Density"
  rect 0.9x1 smd: 1(-0.8,0) 2(0.8,0)
  silkscreen extent 0,-0.5 0,0.5, body extent -0.87,-0.47 0.88,0.48, height 0.55
SFP_SINGLE_PORT [mm]
  rect 0.5x2 smd: 1(3.73,-3.2) 2(4.53,-3.2) 3(5.33,-3.2) 4(6.13,-3.2) 5(6.93,-3.2) 6(7.73,-3.2) 7(8.53,-3.2) 8(9.33,-3.2) 9(10.13,-3.2) 10(10.93,-3.2) 11(10.53,5) 12(9.73,5) 13(8.93,5) 14(8.13,5) 15(7.33,5) 16(6.53,5) 17(5.73,5) 18(4.93,5) 19(4.13,5) 20(3.33,5)
  rect 2x2 hole 1.3: 21(0,0) 22(14.25,5) 23(14.25,-5) 24(0,-10) 25(5.68,-10) 26(11.08,-10) 27(14.25,-15) 28(0,-20) 29(14.25,-25) 30(0,-30) 31(8.58,-30)
  round 0.9 hole 0.9 unplated: ""(0,-7.2) ""(0,-2.5) ""(0,2.5) ""(2.33,7.1) ""(7.13,7.1) ""(11.93,7.1) ""(14.25,-7.2) ""(14.25,-2.5) ""(14.25,2.5)
  round 1.6 hole 1.6 unplated: ""(2.33,0.9) ""(11.93,0.9)
  Top Layer pour cut-out: 1.016,6.858 3.556,6.858 3.556,7.874 5.461,7.874 5.461,6.858 8.382,6.858 8.382,7.874 10.287,7.874 10.287,6.858 13.208,6.858 13.208,-7.747 1.016,-7.747
  Top Layer keep-out region: 11.176,1.905 12.7,1.905 12.7,4.572 11.176,4.572
  Top Layer keep-out region: 11.43,-3.302 12.7,-3.302 12.7,-0.127 11.43,-0.127
  Top Layer keep-out region: 1.524,-3.302 3.048,-3.302 3.048,-0.127 1.524,-0.127
  Top Layer keep-out region: 1.524,1.905 2.794,1.905 2.794,4.572 1.524,4.572
  silkscreen extent -1.14,-34.42 15.37,7.87
SOIC127P600-8AL [mm] "SOIC, 8-Leads, Body 4.9x3.9mm, Pitch 1.27mm, IPC High Density"
  oval 1.7x0.6 smd: 1(-2.45,1.905) 2(-2.45,0.635) 3(-2.45,-0.635) 4(-2.45,-1.905) 5(2.45,-1.905) 6(2.45,-0.635) 7(2.45,0.635) 8(2.45,1.905)
  silkscreen extent -2.57,-2.5 1.2,2.88, body extent -2,-2.5 2,2.5, height 2.72
SOIC127P600-8AL_POWERPAD [mm] "SOIC, 8-Leads, Body 4.9x3.9mm, Pitch 1.27mm, IPC High Density"
  oval 1.7x0.6 smd: 1(-2.45,1.905) 2(-2.45,0.635) 3(-2.45,-0.635) 4(-2.45,-1.905) 5(2.45,-1.905) 6(2.45,-0.635) 7(2.45,0.635) 8(2.45,1.905)
  rect 2.489x2.997 smd: PAD(0,0)
  silkscreen extent -2.58,-2.5 1.2,2.88, body extent -2,-2.5 2,2.5, height 2.72
SOT223-4L [mm] "SOT223, 4-Leads, Body 6.5x3.5mm, Pitch 2.3mm, Lead Span 7mm, IPC High Density"
  rect 2.1x0.9 smd: 1(-2.85,2.3) 2(-2.85,0) 3(-2.85,-2.3)
  rect 2.1x3.2 smd: 4(2.85,0)
  silkscreen extent -2.98,-3.35 1.5,3.42, body extent -1.85,-3.35 1.85,3.35, height 1.8
SOT-23 [mm] "SOT-23; 3 Leads; Body 3.0 x 2.6 mm, inc. leads (LxW max)"
  rect 0.9x0.95 smd: 1(-0.95,-1.25) 2(0.95,-1.25) 3(0,1.25)
  silkscreen extent -2.07,-1.37 1.3,1.25
TSOP65P640-16AM [mm] "TSOP, 16-Leads, Body 5x4.4mm, Pitch 0.65mm, IPC Low Density"
  oval 2x0.35 smd: 1(-2.9,2.275) 2(-2.9,1.625) 3(-2.9,0.975) 4(-2.9,0.325) 5(-2.9,-0.325) 6(-2.9,-0.975) 7(-2.9,-1.625) 8(-2.9,-2.275) 9(2.9,-2.275) 10(2.9,-1.625) 11(2.9,-0.975) 12(2.9,-0.325) 13(2.9,0.325) 14(2.9,0.975) 15(2.9,1.625) 16(2.9,2.275)
  silkscreen extent -3.03,-2.55 1.5,3.12, body extent -2.25,-2.55 2.25,2.55, height 1.1
TSOP65P640-24AL [mm] "TSOP, 24-Leads, Body 7.8x4.4mm, Pitch 0.65mm, IPC High Density"
  oval 1.4x0.35 smd: 1(-2.8,3.575) 2(-2.8,2.925) 3(-2.8,2.275) 4(-2.8,1.625) 5(-2.8,0.975) 6(-2.8,0.325) 7(-2.8,-0.325) 8(-2.8,-0.975) 9(-2.8,-1.625) 10(-2.8,-2.275) 11(-2.8,-2.925) 12(-2.8,-3.575) 13(2.8,-3.575) 14(2.8,-2.925) 15(2.8,-2.275) 16(2.8,-1.625) 17(2.8,-0.975) 18(2.8,-0.325) 19(2.8,0.325) 20(2.8,0.975) 21(2.8,1.625) 22(2.8,2.275) 23(2.8,2.925) 24(2.8,3.575)
  silkscreen extent -2.92,-3.95 1.7,4.42, body extent -2.25,-3.95 2.25,3.95, height 1.1

## Part data
C46 C48 C73_SFP_DP0 C73_SFP_DP1 C73_SFP_DP2 C73_SFP_DP3 C73_SFP_DP4 C73_SFP_DP5 C73_SFP_DP6 C73_SFP_DP7 C74_SFP_DP0 C74_SFP_DP1 C74_SFP_DP2 C74_SFP_DP3 C74_SFP_DP4 C74_SFP_DP5 C74_SFP_DP6 C74_SFP_DP7 C84: library part CC0603_10NF_50V_10%_X7R, "Non-polarised capacitor"
C75 C76 C77 C78 C79_SFP_DP0 C79_SFP_DP1 C79_SFP_DP2 C79_SFP_DP3 C79_SFP_DP4 C79_SFP_DP5 C79_SFP_DP6 C79_SFP_DP7 C80_SFP_DP0 C80_SFP_DP1 C80_SFP_DP2 C80_SFP_DP3 C80_SFP_DP4 C80_SFP_DP5 C80_SFP_DP6 C80_SFP_DP7 C81_SFP_DP0 C81_SFP_DP1 C81_SFP_DP2 C81_SFP_DP3 C81_SFP_DP4 C81_SFP_DP5 C81_SFP_DP6 C81_SFP_DP7 C90 C118_SFP_DP0 C118_SFP_DP1 C118_SFP_DP2 C118_SFP_DP3 C118_SFP_DP4 C118_SFP_DP5 C118_SFP_DP6 C118_SFP_DP7 C121 C121_SFP_DP0 C121_SFP_DP1 C121_SFP_DP2 C121_SFP_DP3 C121_SFP_DP4 C121_SFP_DP5 C121_SFP_DP6 C121_SFP_DP7 C123_SFP_DP0 C123_SFP_DP1 C123_SFP_DP2 C123_SFP_DP3 C123_SFP_DP4 C123_SFP_DP5 C123_SFP_DP6 C123_SFP_DP7: library part CC0603_100NF_50V_10%_X7R, "Non-polarised capacitor"
C85: library part "Cap Pol1", "Polarized Capacitor (Radial)"
C86 C87 C88 C89: library part CC1206_10UF_16V_10%_X7R, "Non-polarised capacitor"
C91: library part CC0603_1UF_16V_10%_X7R, "Non-polarised capacitor"
C92 C93: library part CC1206_1UF_16V_10%_X7R, "Non-polarised capacitor"
C117_SFP_DP0 C117_SFP_DP1 C117_SFP_DP2 C117_SFP_DP3 C117_SFP_DP4 C117_SFP_DP5 C117_SFP_DP6 C117_SFP_DP7 C120_SFP_DP0 C120_SFP_DP1 C120_SFP_DP2 C120_SFP_DP3 C120_SFP_DP4 C120_SFP_DP5 C120_SFP_DP6 C120_SFP_DP7 C122_SFP_DP0 C122_SFP_DP1 C122_SFP_DP2 C122_SFP_DP3 C122_SFP_DP4 C122_SFP_DP5 C122_SFP_DP6 C122_SFP_DP7: library part CC1206_10UF_10V_10%_X7R, "Non-polarised capacitor"
CN1: library part UTCA_MCH_SOCKET, "microTCA MTCA.0  MCH socket (AMC0.0 B+ connector with reversed pins)"
CN2: library part "Header 2", "Header, 2-Pin"
CN8_SFP_DP0 CN8_SFP_DP1 CN8_SFP_DP2 CN8_SFP_DP3 CN8_SFP_DP4 CN8_SFP_DP5 CN8_SFP_DP6 CN8_SFP_DP7: library part SFP_SOCKET_SINGLE, "Socket for SFP module"
D1: library part "D Schottky", "Schottky Diode"
IC4: "1-to-8 I2C bus mux"
IC5 IC6 IC7 IC9_SFP_DP0 IC9_SFP_DP1 IC9_SFP_DP2 IC9_SFP_DP3 IC9_SFP_DP4 IC9_SFP_DP5 IC9_SFP_DP6 IC9_SFP_DP7 IC10_SFP_DP0 IC10_SFP_DP1 IC10_SFP_DP2 IC10_SFP_DP3 IC10_SFP_DP4 IC10_SFP_DP5 IC10_SFP_DP6 IC10_SFP_DP7 IC13: "LVDS buffer with enable"
IC8: library part PCA9534, "8-bit I2C I/O expander"
IC8_SFP_DP0 IC8_SFP_DP1 IC8_SFP_DP2 IC8_SFP_DP3 IC8_SFP_DP4 IC8_SFP_DP5 IC8_SFP_DP6 IC8_SFP_DP7: "8-bit I2C I/O expander"
IC11: "Step-down switchmode converter"
IC12: library part 1117, "Three-Terminal Adjustable Output Positive Voltage Regulator"
L1: library part Inductor, "Inductor"
L8_SFP_DP0 L8_SFP_DP1 L8_SFP_DP2 L8_SFP_DP3 L8_SFP_DP4 L8_SFP_DP5 L8_SFP_DP6 L8_SFP_DP7 L9_SFP_DP0 L9_SFP_DP1 L9_SFP_DP2 L9_SFP_DP3 L9_SFP_DP4 L9_SFP_DP5 L9_SFP_DP6 L9_SFP_DP7: "Ferrite bead"
LD1_SFP_DP0 LD1_SFP_DP1 LD1_SFP_DP2 LD1_SFP_DP3 LD1_SFP_DP4 LD1_SFP_DP5 LD1_SFP_DP6 LD1_SFP_DP7: library part LED_DIALIGHT_571-0112-100F, "2x LED  Botom Green, Top Red"
Q1: library part Q_FDT434P, "P-Channel MOSFET"
Q2: library part Q_BC847B, "Transistor"
R1 R2 R3 R4 R6 R11 R12 R21_SFP_DP0 R21_SFP_DP1 R21_SFP_DP2 R21_SFP_DP3 R21_SFP_DP4 R21_SFP_DP5 R21_SFP_DP6 R21_SFP_DP7 R22_SFP_DP0 R22_SFP_DP1 R22_SFP_DP2 R22_SFP_DP3 R22_SFP_DP4 R22_SFP_DP5 R22_SFP_DP6 R22_SFP_DP7 R76: library part R0603_10K_1%_0.1W_100PPM, "Resistor - 1%"
R5: library part R0603_220K_1%_0.1W_100PPM, "Resistor - 1%"
R9_SFP_DP0 R9_SFP_DP1 R9_SFP_DP2 R9_SFP_DP3 R9_SFP_DP4 R9_SFP_DP5 R9_SFP_DP6 R9_SFP_DP7 R10_SFP_DP0 R10_SFP_DP1 R10_SFP_DP2 R10_SFP_DP3 R10_SFP_DP4 R10_SFP_DP5 R10_SFP_DP6 R10_SFP_DP7: library part R0603_330R_1%_0.1W_100PPM, "Resistor - 1%"
R70_SFP_DP0 R70_SFP_DP1 R70_SFP_DP2 R70_SFP_DP3 R70_SFP_DP4 R70_SFP_DP5 R70_SFP_DP6 R70_SFP_DP7 R71_SFP_DP0 R71_SFP_DP1 R71_SFP_DP2 R71_SFP_DP3 R71_SFP_DP4 R71_SFP_DP5 R71_SFP_DP6 R71_SFP_DP7: library part R0603_0R_JUMPER, "Resistor - 1%"
R77: library part R0603_5K76_0.1%_0.063W_10PPM, "Resistor - 0.1%"
RP1_SFP_DP0 RP1_SFP_DP1 RP1_SFP_DP2 RP1_SFP_DP3 RP1_SFP_DP4 RP1_SFP_DP5 RP1_SFP_DP6 RP1_SFP_DP7: library part RES_ARRAY_1206, "Resistor network 1206 (4x0402) Maritex RAC4Xxxx"

## Free pads (board coordinates)
  rect 0.48x3.3 on Mech15 paste-5.08: 1(-31.484,-4.962) 2(-30.734,-4.962) 4(-29.234,-4.962) 7(-26.984,-4.962) 9(-25.484,-4.962) 10(-24.734,-4.962) 13(-22.484,-4.962) 16(-20.234,-4.962) 18(-18.734,-4.962) 19(-17.984,-4.962) 22(-15.734,-4.962) 25(-13.484,-4.962) 27(-11.984,-4.962) 28(-11.234,-4.962) 31(-8.984,-4.962) 34(-6.734,-4.962) 37(-4.484,-4.962) 40(-2.234,-4.962) 42(-0.734,-4.962) 43(0.016,-4.962) 46(2.266,-4.962) 49(4.516,-4.962) 52(6.766,-4.962) 55(9.016,-4.962) 57(10.516,-4.962) 58(11.266,-4.962) 61(13.516,-4.962) 64(15.766,-4.962) 67(18.016,-4.962) 70(20.266,-4.962) 72(21.766,-4.962) 73(22.516,-4.962) 76(24.766,-4.962) 79(27.016,-4.962) 82(29.266,-4.962) 84(30.766,-4.962) 85(31.516,-4.962) 86(31.516,-4.962) 89(29.266,-4.962) 92(27.016,-4.962) 95(24.766,-4.962) 98(22.516,-4.962) 101(20.266,-4.962) 104(18.016,-4.962) 107(15.766,-4.962) 110(13.516,-4.962) 113(11.266,-4.962) 116(9.016,-4.962) 119(6.766,-4.962) 122(4.516,-4.962) 125(2.266,-4.962) 128(0.016,-4.962) 131(-2.234,-4.962) 134(-4.484,-4.962) 137(-6.734,-4.962) 140(-8.984,-4.962) 143(-11.234,-4.962) 146(-13.484,-4.962) 149(-15.734,-4.962) 152(-17.984,-4.962) 155(-20.234,-4.962) 158(-22.484,-4.962) 161(-24.734,-4.962) 164(-26.984,-4.962) 170(-31.484,-4.962)
  rect 0.48x0.95 on Mech15 paste-5.08: 2mate(-28.484,-3.787) 2mate(-27.734,-3.787) 2mate(-26.234,-3.787) 2mate(-19.484,-3.787) 2mate(-12.734,-3.787) 2mate(-1.484,-3.787) 2mate(9.766,-3.787) 2mate(21.016,-3.787)
  rect 0.48x1.1 on Mech15 paste-5.08: 3(-29.984,-6.062) 83(30.016,-6.062)
  rect 0.48x1.7 on Mech15 paste-5.08: 3mate(-30.734,-4.162) 3mate(-29.984,-4.162) 3mate(-29.234,-4.162) 3mate(-28.484,-4.162) 3mate(-27.734,-4.162) 3mate(-26.234,-4.162) 3mate(-25.484,-4.162) 3mate(-23.984,-4.162) 3mate(-23.984,-4.162) 3mate(-23.234,-4.162) 3mate(-23.234,-4.162) 3mate(-21.734,-4.162) 3mate(-21.734,-4.162) 3mate(-20.984,-4.162) 3mate(-20.984,-4.162) 3mate(-19.484,-4.162) 3mate(-18.734,-4.162) 3mate(-17.234,-4.162) 3mate(-17.234,-4.162) 3mate(-16.484,-4.162) 3mate(-16.484,-4.162) 3mate(-14.984,-4.162) 3mate(-14.984,-4.162) 3mate(-14.234,-4.162) 3mate(-14.234,-4.162) 3mate(-12.734,-4.162) 3mate(-11.984,-4.162) 3mate(-10.484,-4.162) 3mate(-10.484,-4.162) 3mate(-9.734,-4.162) 3mate(-9.734,-4.162) 3mate(-8.234,-4.162) 3mate(-8.234,-4.162) 3mate(-7.484,-4.162) 3mate(-7.484,-4.162) 3mate(-5.984,-4.162) 3mate(-5.984,-4.162) 3mate(-5.234,-4.162) 3mate(-5.234,-4.162) 3mate(-3.734,-4.162) 3mate(-3.734,-4.162) 3mate(-2.984,-4.162) 3mate(-2.984,-4.162) 3mate(-1.484,-4.162) 3mate(-0.734,-4.162) 3mate(0.766,-4.162) 3mate(0.766,-4.162) 3mate(1.516,-4.162) 3mate(1.516,-4.162) 3mate(3.016,-4.162) 3mate(3.016,-4.162) 3mate(3.766,-4.162) 3mate(3.766,-4.162) 3mate(5.266,-4.162) 3mate(5.266,-4.162) 3mate(6.016,-4.162) 3mate(6.016,-4.162) 3mate(7.516,-4.162) 3mate(7.516,-4.162) 3mate(8.266,-4.162) 3mate(8.266,-4.162) 3mate(9.766,-4.162) 3mate(10.516,-4.162) 3mate(12.016,-4.162) 3mate(12.016,-4.162) 3mate(12.766,-4.162) 3mate(12.766,-4.162) 3mate(14.266,-4.162) 3mate(14.266,-4.162) 3mate(15.016,-4.162) 3mate(15.016,-4.162) 3mate(16.516,-4.162) 3mate(16.516,-4.162) 3mate(17.266,-4.162) 3mate(17.266,-4.162) 3mate(18.766,-4.162) 3mate(18.766,-4.162) 3mate(19.516,-4.162) 3mate(19.516,-4.162) 3mate(21.016,-4.162) 3mate(21.766,-4.162) 3mate(23.266,-4.162) 3mate(23.266,-4.162) 3mate(24.016,-4.162) 3mate(24.016,-4.162) 3mate(25.516,-4.162) 3mate(25.516,-4.162) 3mate(26.266,-4.162) 3mate(26.266,-4.162) 3mate(27.766,-4.162) 3mate(27.766,-4.162) 3mate(28.516,-4.162) 3mate(28.516,-4.162) 3mate(30.016,-4.162) 3mate(30.766,-4.162)
  rect 0.48x2.15 on Mech15 paste-5.08: 5(-28.484,-5.537) 6(-27.734,-5.537) 8(-26.234,-5.537) 17(-19.484,-5.537) 26(-12.734,-5.537) 41(-1.484,-5.537) 56(9.766,-5.537) 71(21.016,-5.537)
  rect 0.48x1.4 on Mech15 paste-5.08: 11(-23.984,-5.912) 12(-23.234,-5.912) 14(-21.734,-5.912) 15(-20.984,-5.912) 20(-17.234,-5.912) 21(-16.484,-5.912) 23(-14.984,-5.912) 24(-14.234,-5.912) 29(-10.484,-5.912) 30(-9.734,-5.912) 32(-8.234,-5.912) 33(-7.484,-5.912) 35(-5.984,-5.912) 36(-5.234,-5.912) 38(-3.734,-5.912) 39(-2.984,-5.912) 44(0.766,-5.912) 45(1.516,-5.912) 47(3.016,-5.912) 48(3.766,-5.912) 50(5.266,-5.912) 51(6.016,-5.912) 53(7.516,-5.912) 54(8.266,-5.912) 59(12.016,-5.912) 60(12.766,-5.912) 62(14.266,-5.912) 63(15.016,-5.912) 65(16.516,-5.912) 66(17.266,-5.912) 68(18.766,-5.912) 69(19.516,-5.912) 74(23.266,-5.912) 75(24.016,-5.912) 77(25.516,-5.912) 78(26.266,-5.912) 80(27.766,-5.912) 81(28.516,-5.912) 87(30.766,-5.912) 88(30.016,-5.912) 90(28.516,-5.912) 91(27.766,-5.912) 93(26.266,-5.912) 94(25.516,-5.912) 96(24.016,-5.912) 97(23.266,-5.912) 99(21.766,-5.912) 100(21.016,-5.912) 102(19.516,-5.912) 103(18.766,-5.912) 105(17.266,-5.912) 106(16.516,-5.912) 108(15.016,-5.912) 109(14.266,-5.912) 111(12.766,-5.912) 112(12.016,-5.912) 114(10.516,-5.912) 115(9.766,-5.912) 117(8.266,-5.912) 118(7.516,-5.912) 120(6.016,-5.912) 121(5.266,-5.912) 123(3.766,-5.912) 124(3.016,-5.912) 126(1.516,-5.912) 127(0.766,-5.912) 129(-0.734,-5.912) 130(-1.484,-5.912) 132(-2.984,-5.912) 133(-3.734,-5.912) 135(-5.234,-5.912) 136(-5.984,-5.912) 138(-7.484,-5.912) 138(-7.484,-5.912) 139(-8.234,-5.912) 141(-9.734,-5.912) 142(-10.484,-5.912) 144(-11.984,-5.912) 145(-12.734,-5.912) 147(-14.234,-5.912) 148(-14.984,-5.912) 150(-16.484,-5.912) 151(-17.234,-5.912) 153(-18.734,-5.912) 154(-19.484,-5.912) 156(-20.984,-5.912) 157(-21.734,-5.912) 159(-23.234,-5.912) 160(-23.984,-5.912) 162(-25.484,-5.912) 163(-26.234,-5.912) 165(-27.734,-5.912) 166(-28.484,-5.912) 167(-29.234,-5.912) 168(-29.984,-5.912) 169(-30.734,-5.912)
  rect 4.7x4.7 hole 2.7: ESD_STRIP_SEGMENT_3(34.116,-162.612)
  rect 0.48x2 on Mech15 paste-5.08: lmate(-29.984,-4.312) lmate(30.016,-4.312)
  round 6.5 hole 3.5: MOUNT(-41.952,-171.133) MOUNT(-41.952,-13.133) MOUNT(48.048,-85.133) MOUNT(48.048,-13.133) MOUNT(176.048,-171.133) MOUNT(176.048,-97.133)
  rect 4x4 hole 2.7: ""(-33.484,-179.362)
  round 6 hole 3: ""(-31.484,-142.612) ""(31.516,-142.612)
  round 5.5 hole 3: ""(-31.484,-37.612) ""(-31.484,-20.612) ""(31.516,-37.612) ""(31.516,-20.612)

## Via types
v1: diameter 0.66, hole 0.305, Top Layer to Bottom Layer, tented both sides, 576 vias
v2: diameter 0.711, hole 0.33, Top Layer to Bottom Layer, tented both sides, 97 vias
v3: diameter 0.66, hole 0.305, Top Layer to Bottom Layer, 3 vias